# Altium PCB PCB1.PcbDoc (part 1 of 4)
Units mil, origin at the board's own origin, x right, y up, seen from the top; angles counter-clockwise.
Board outline 4724.41 x 4724.41 mil, 4 copper layers (Top Layer, GND, VCC, Bottom Layer); 291 components, 240 nets, 990 pads, 328 vias.
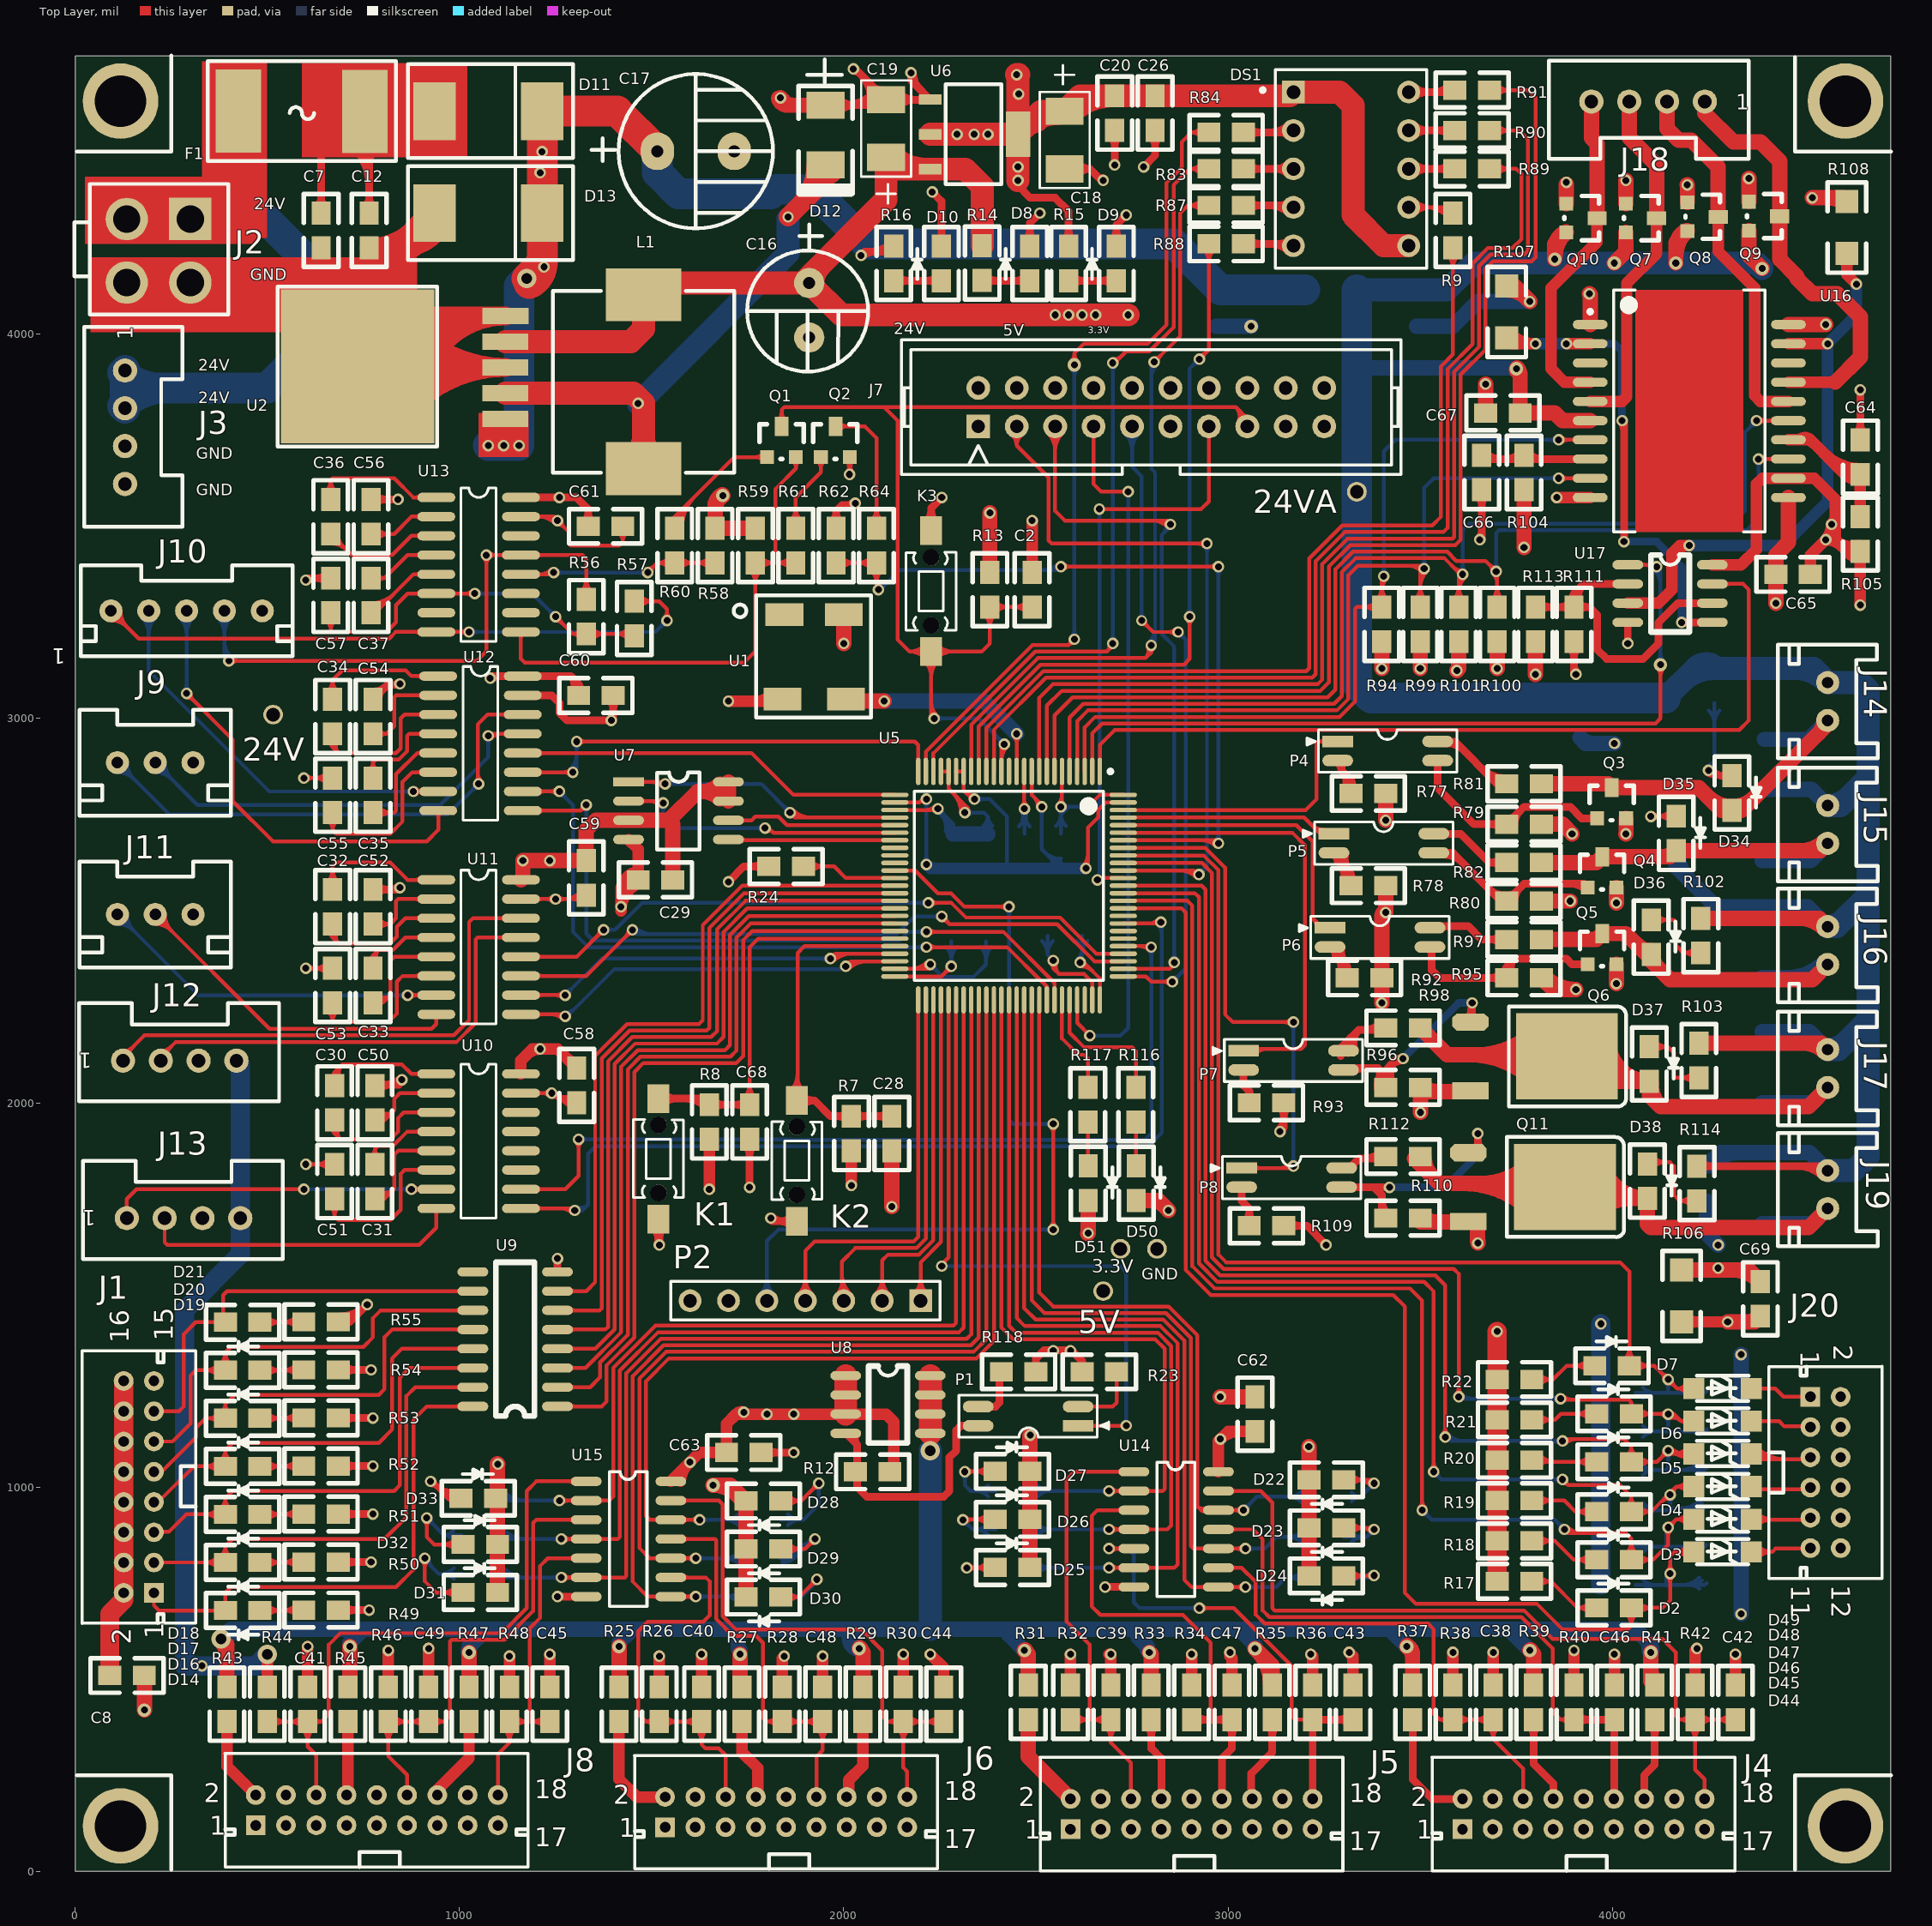
[diagram p0: Top Layer view]
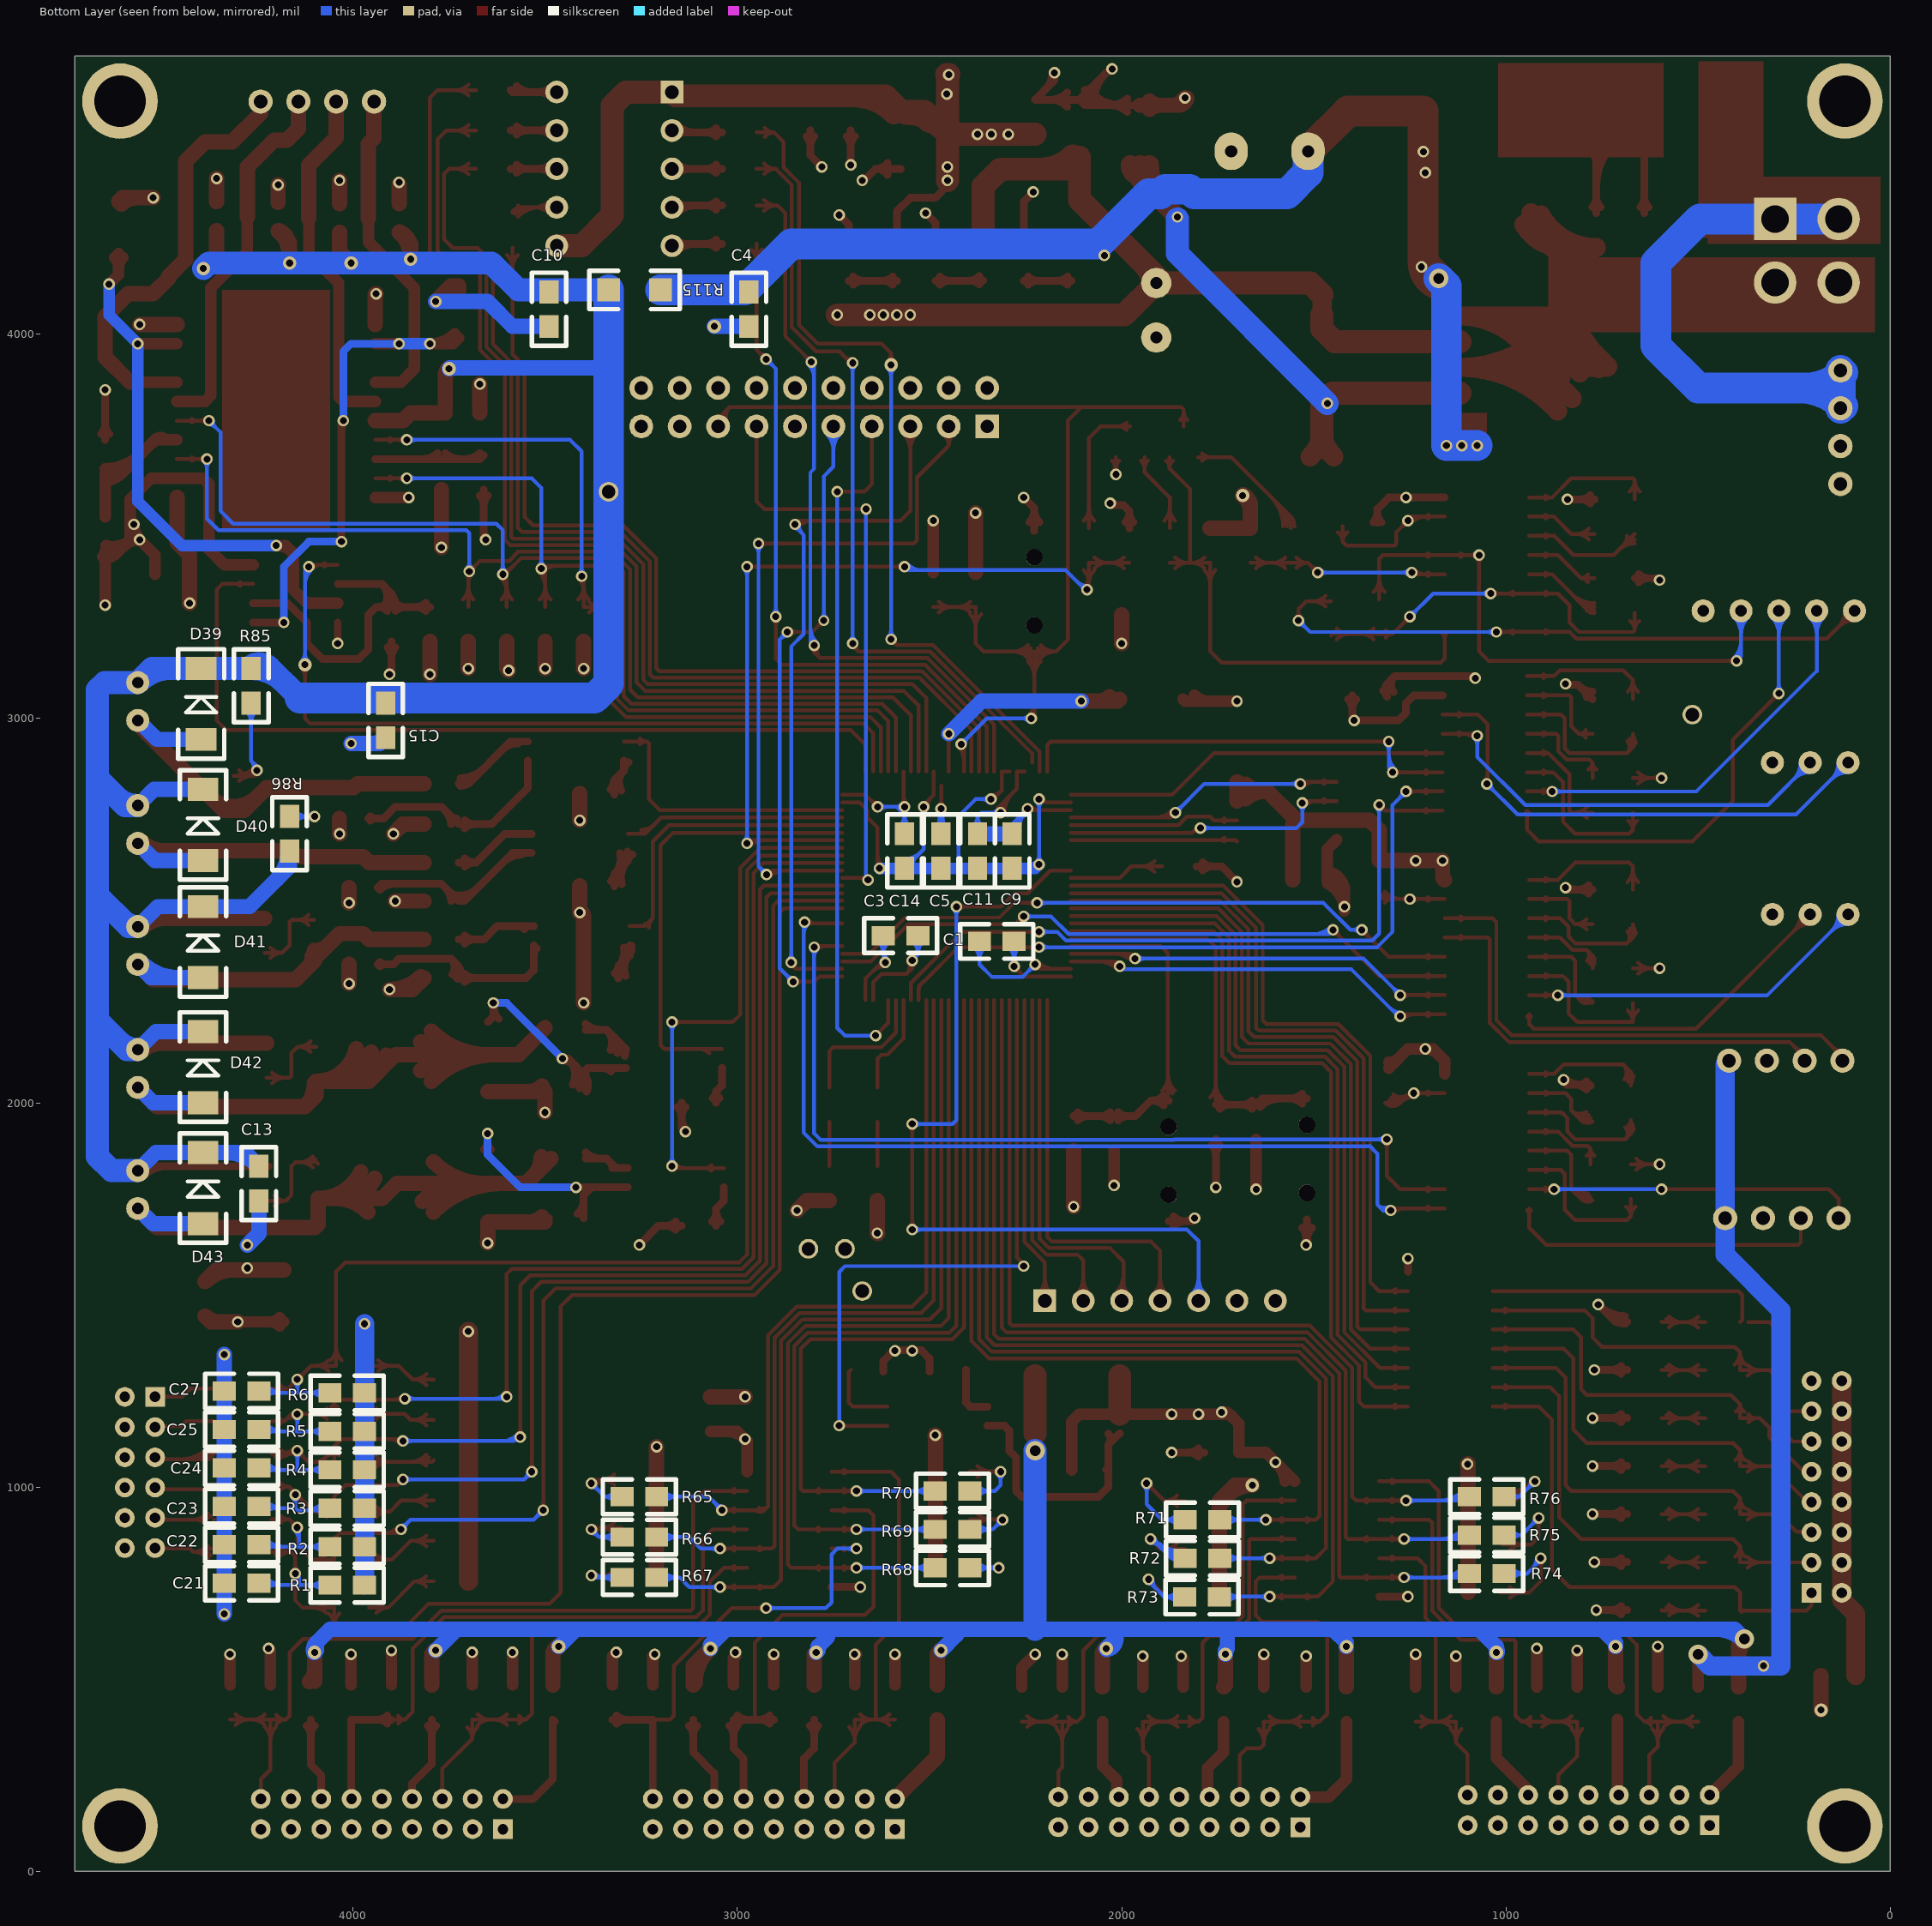
[diagram p1: Bottom Layer view, seen from below]
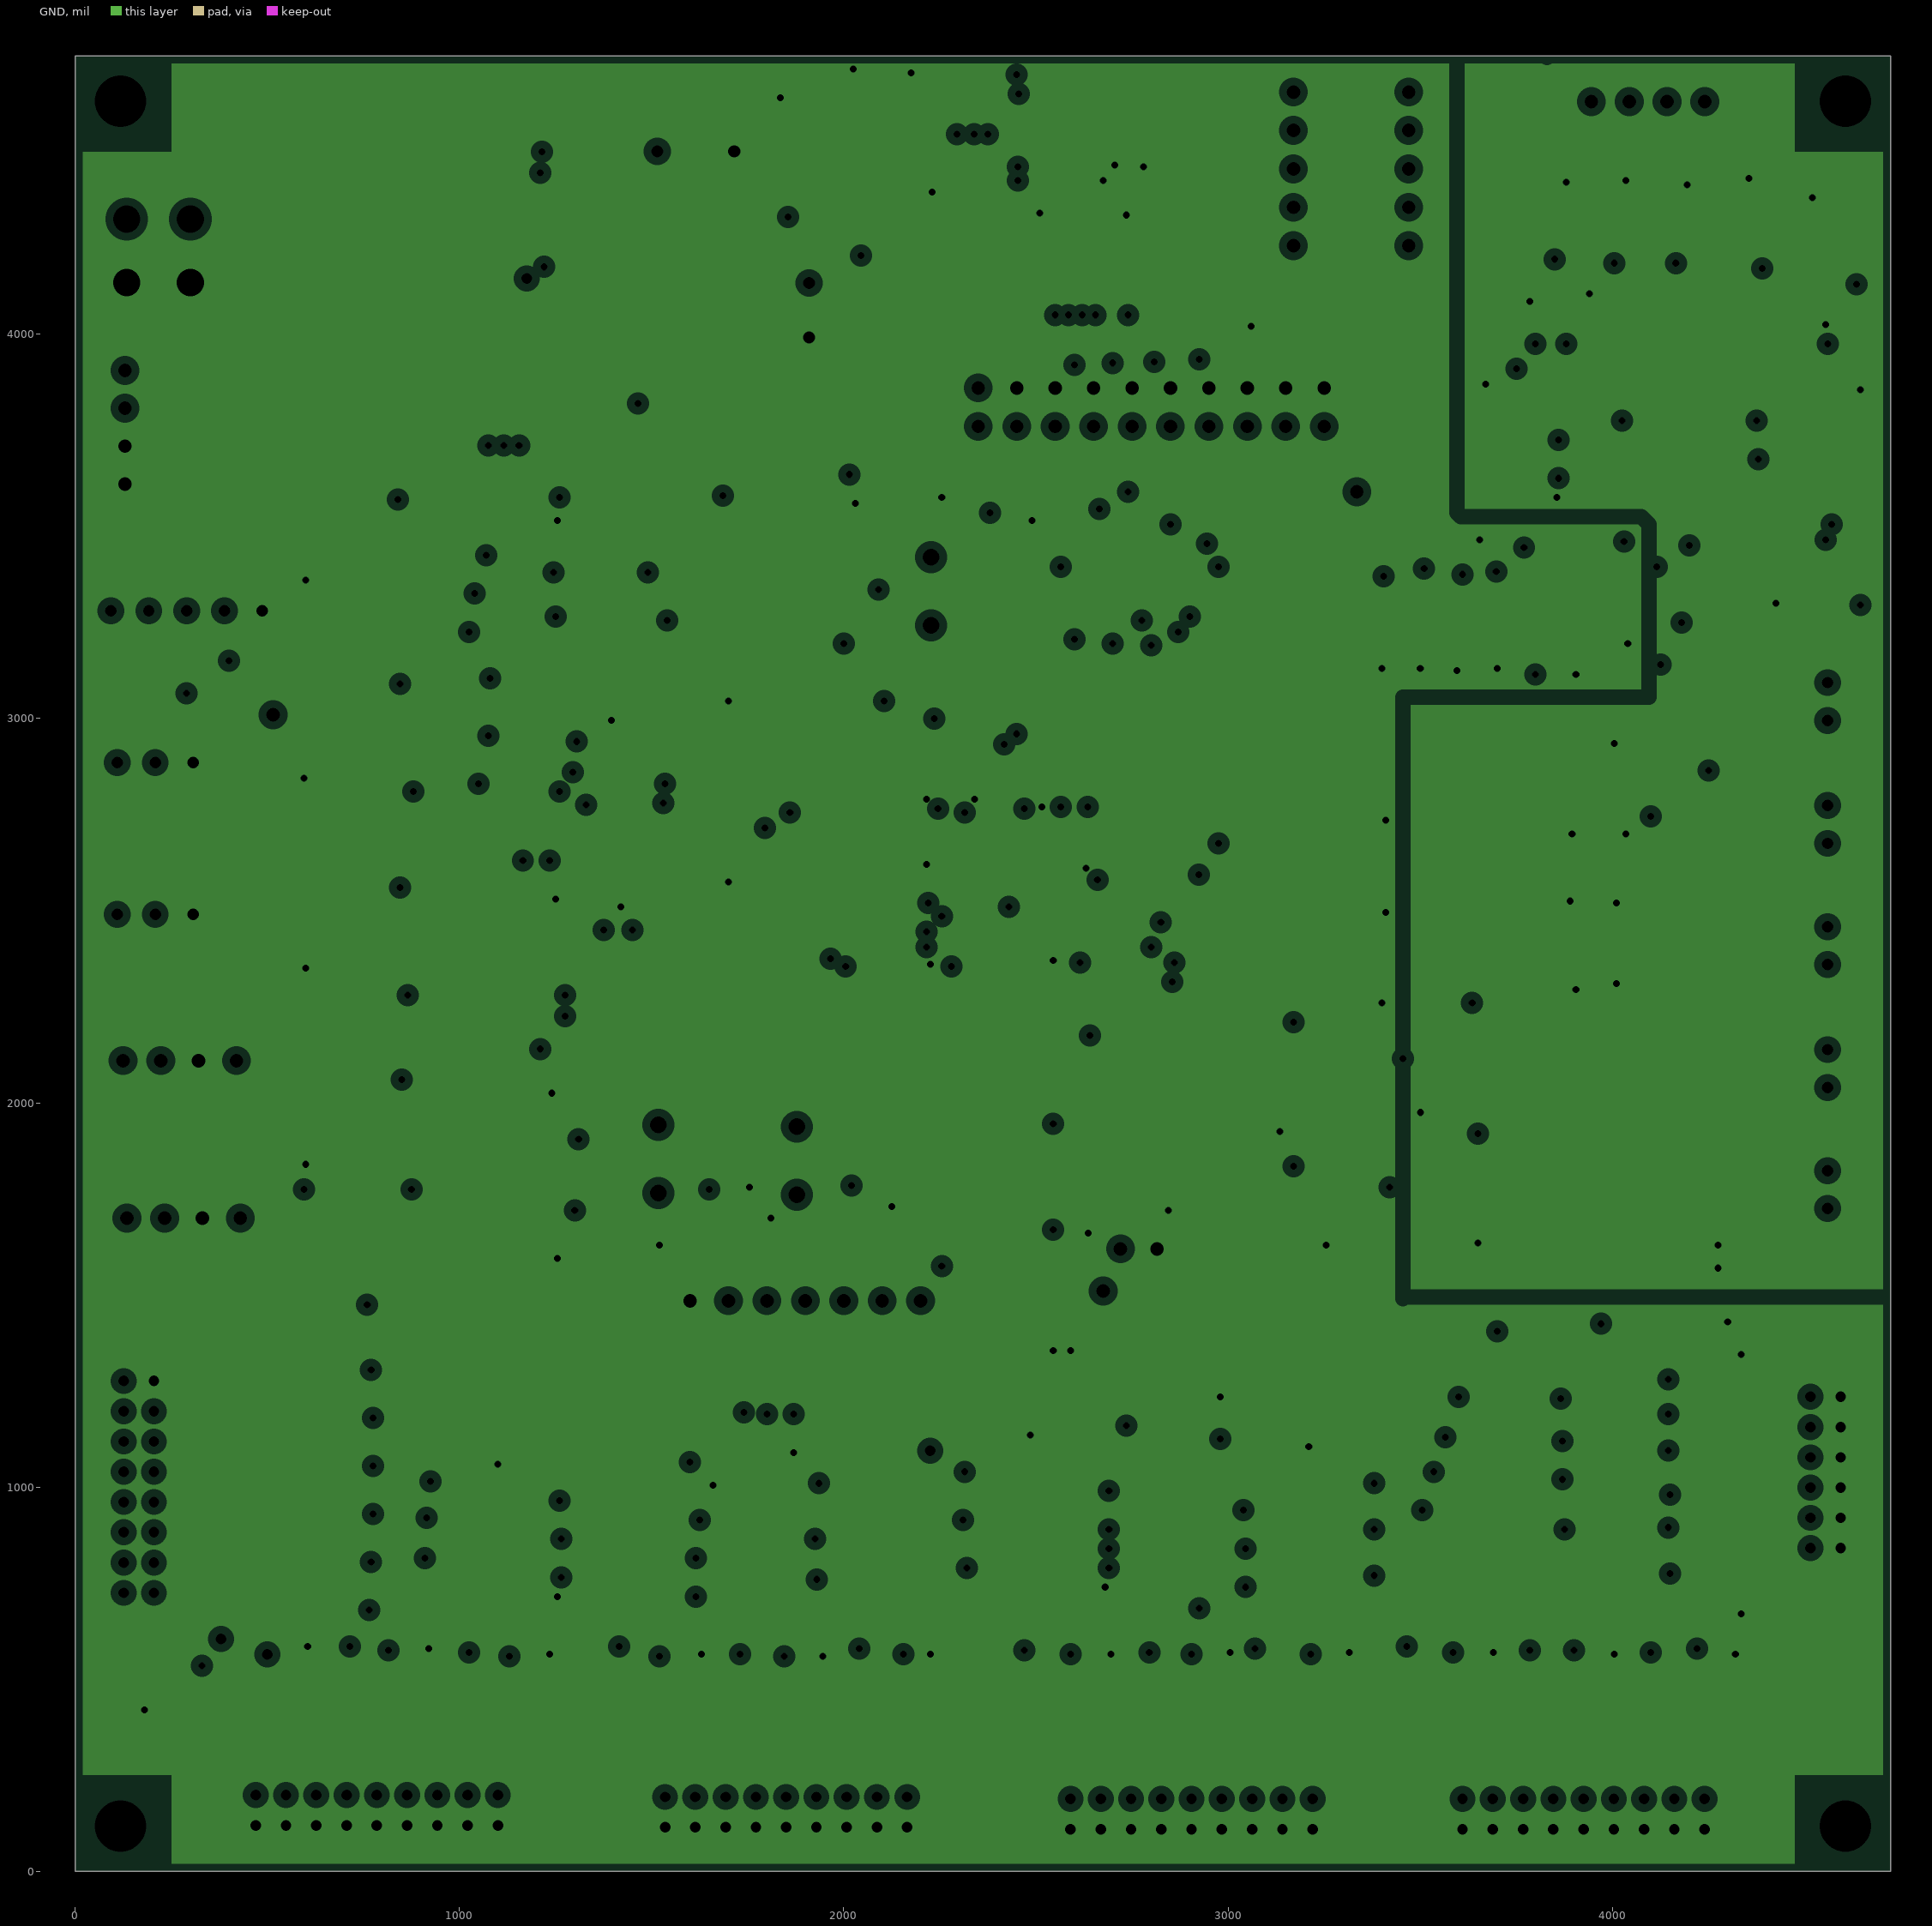
[diagram p2: GND, clearances drawn from the general rule]
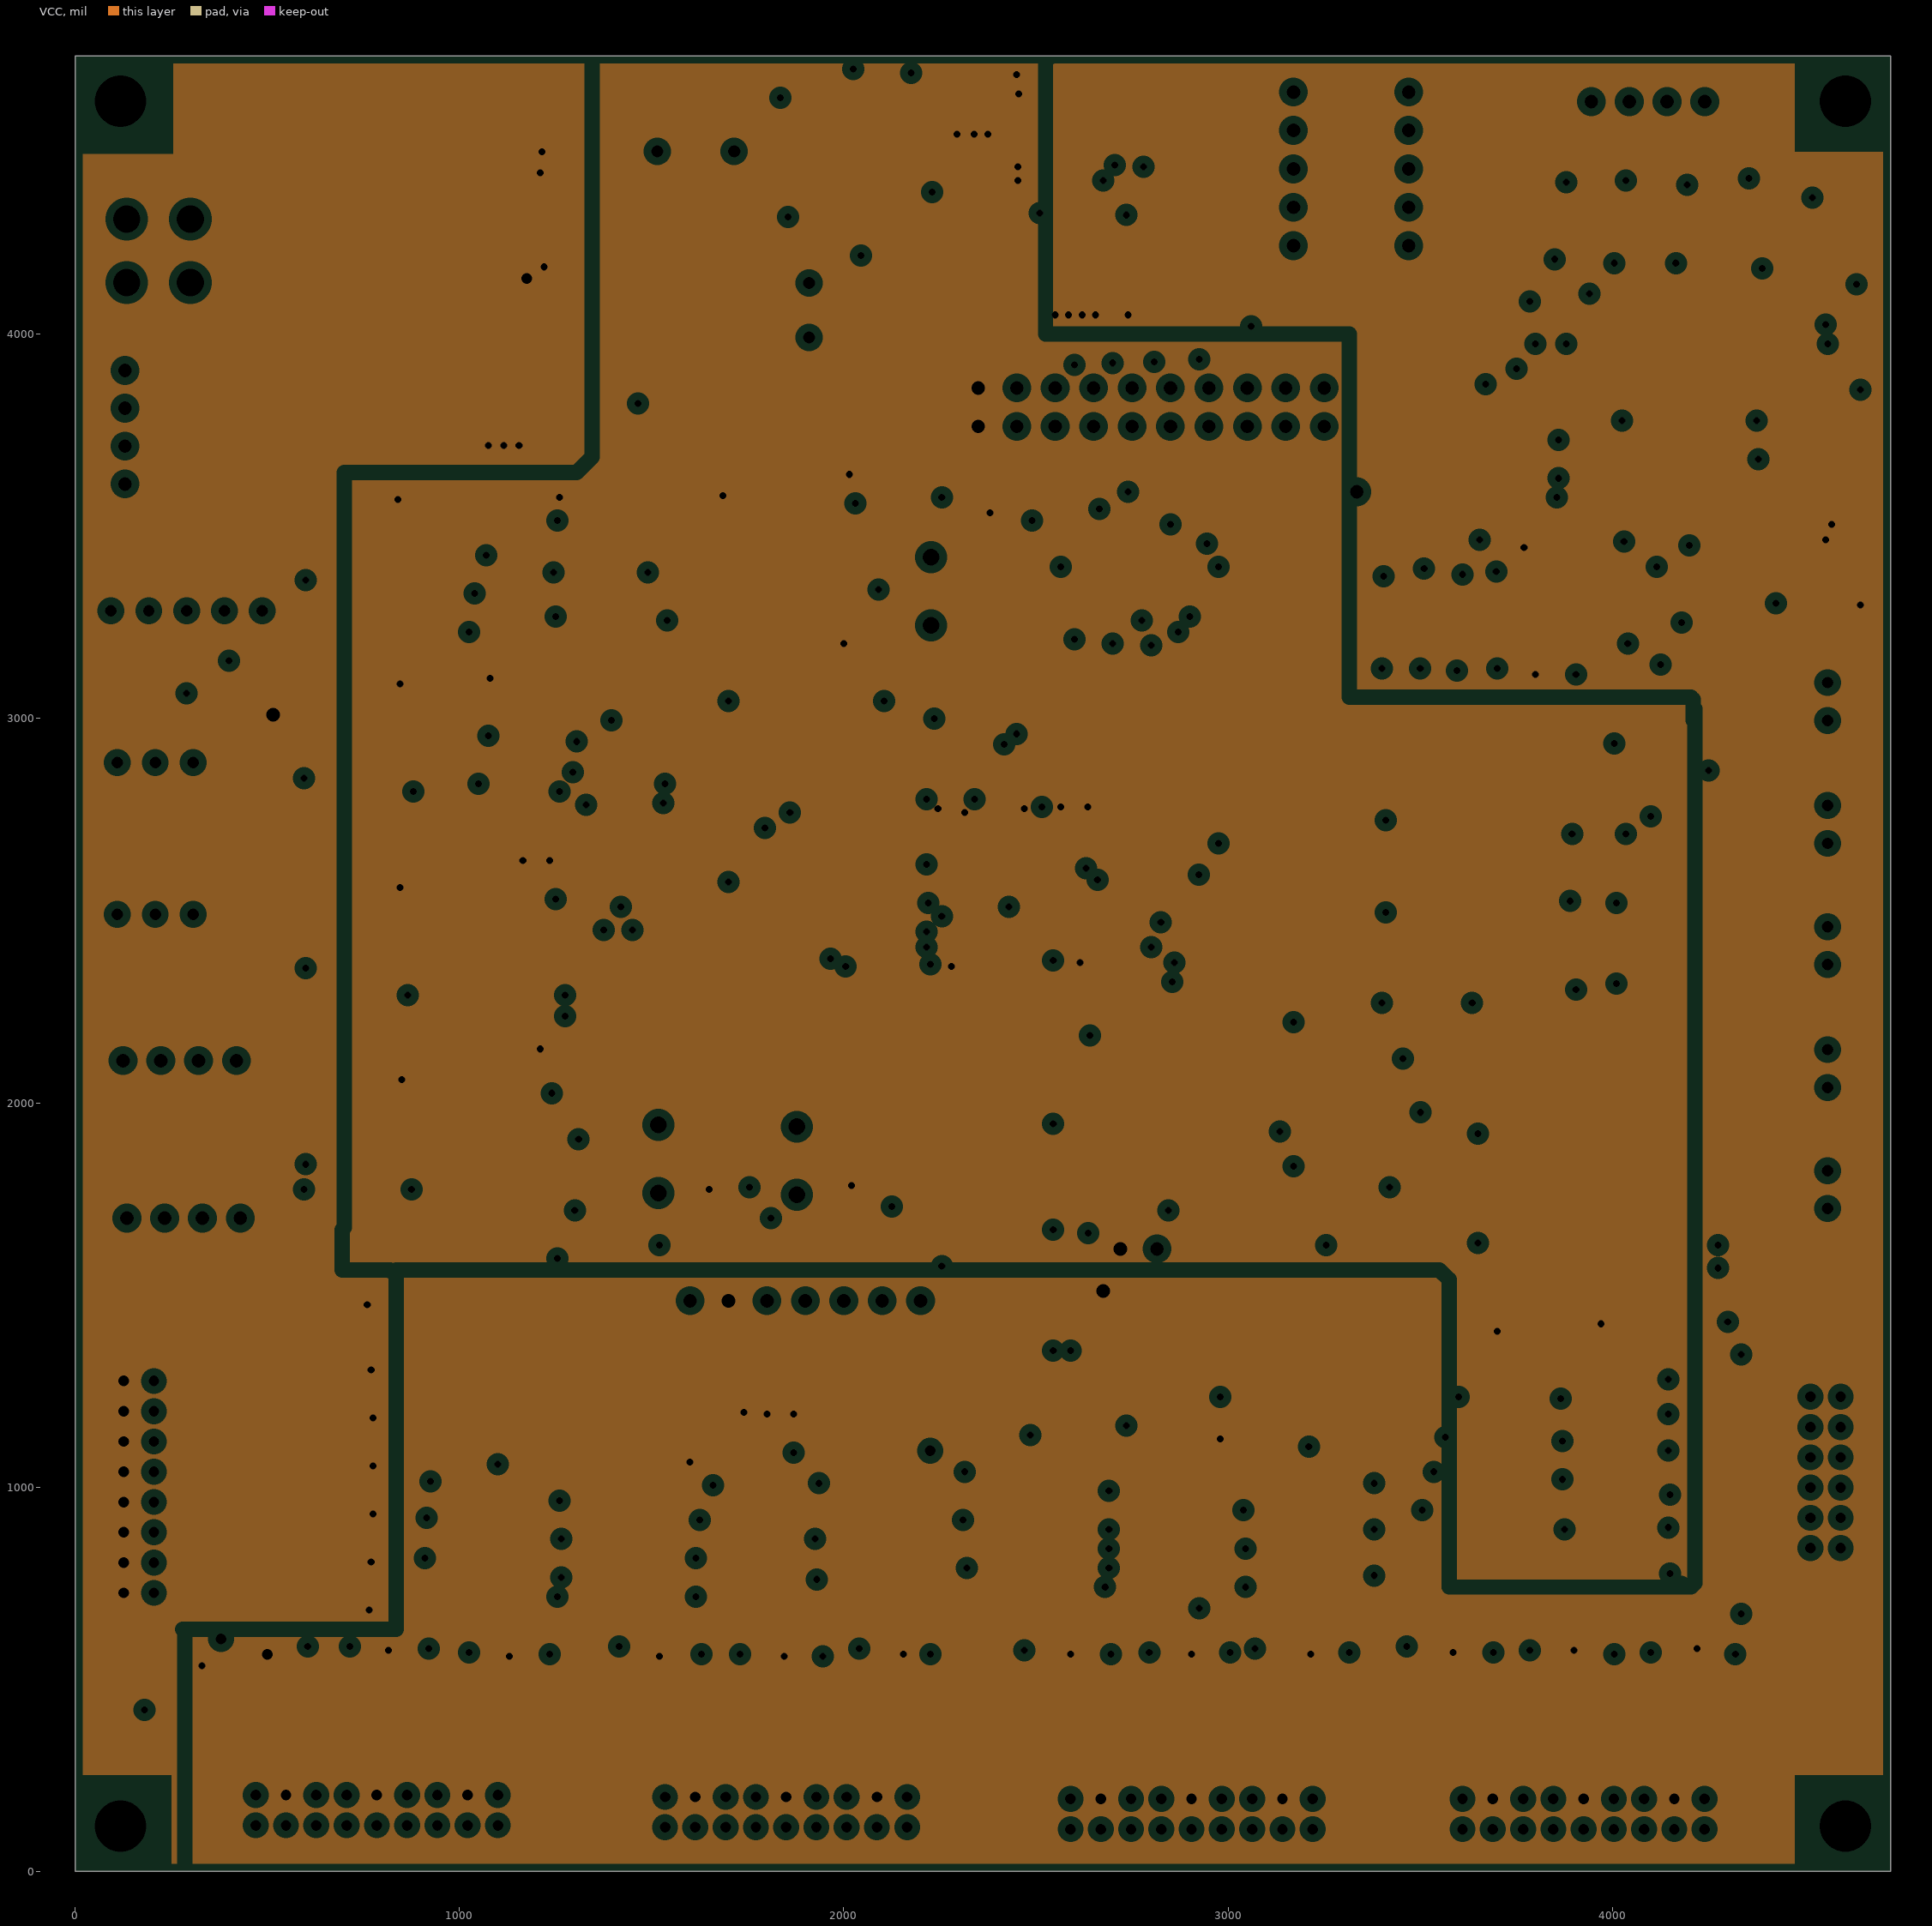
[diagram p3: VCC, clearances drawn from the general rule]

## Layer stack, top to bottom
Top Layer: signal copper 1.4
Dielectric: core 12.6, FR-4, Dk 4.8
GND: plane copper 1.4, net (Multiple Nets)
Dielectric: prepreg 12.6, FR-4, Dk 4.8
VCC: plane copper 1.4, net (Multiple Nets)
Dielectric: core 12.6, FR-4, Dk 4.8
Bottom Layer: signal copper 1.4

## Board outline
0,0 0,4724.41 4724.41,4724.41 4724.41,0

## Design rules (kind name [scope] priority, off if disabled: settings)
Clearance [All] p1: gap=7
ComponentClearance [All] p1 off: gap=10 collisioncheckmode=3 verticalgap=10 showdistances=FALSE
PlaneClearance [All] p1: clearance=20
PlaneConnect [All] p1: planeconnectstyle=Relief reliefexpansion=20 reliefentries=4 reliefconductorwidth=10 reliefairgap=10
PolygonConnect [All] p1: connectstyle=Relief reliefconductorwidth=10 reliefentries=4 polygonreliefangle="90 Angle" airgapwidth=10
RoutingVias [All] p1: holewidth=100 width=50 viastyle="Through Hole" minholewidth=10 minwidth=20 maxholewidth=28 maxwidth=200
SilkToSilkClearance [All] p1 off: silktosilkclearance=10
SolderMaskExpansion [All] p1: expansion=4
Width [All] p1: maxlimit=100 minlimit=10 preferedwidth=10
24 further rules are at their usual default settings.

## Components (designator, comment, footprint, x,y, rotation, side; value= is the part's Value field where it differs from the comment)
C1 "100nF-0805-50V-20%" 0805 2280,2420 r0 bottom
C2 "100nF-0805-50V-20%" 0805 2490,3380 r270 top
C3 "100nF-0805-50V-20%" 0805 2620,2435 r180 bottom
C4 "100nF-0805-50V-20%" 0805 2970,4110 r270 bottom
C5 "100nF-0805-50V-20%" 0805 2470,2610 r90 bottom
C7 "100nF-0805-50V-20%" 0805 640,4315 r270 top
C8 "100nF-0805-50V-20%" 0805 90,510 r0 top
C9 "100nF-0805-50V-20%" 0805 2285,2700 r270 bottom
C10 "100nF-0805-50V-20%" 0805 3490,4110 r270 bottom
C11 "100nF-0805-50V-20%" 0805 2375,2700 r270 bottom
C12 "10nF-0805-50V-20%" 0805 765,4315 r270 top
C13 "100nF-0805-50V-20%" 0805 4245,1835 r270 bottom
C14 "100nF-0805-50V-20%" 0805 2565,2700 r270 bottom
C15 "100nF-0805-50V-20%" 0805 3915,3040 r270 bottom
C16 "'16V-YXA-330UF-20%  8*11.5" "RB.2/.4 - 8MM" 1910,4070 r0 top
C17 "35YXF1000MEFC1V12.5*25" RB.2/.4 1605,4480 r90 top
C18 "10uF-1411-16V-20%" 1411-B 2575,4580 r270 top
C19 "10uF-1411-16V-20%" 1411-B 2110,4460 r90 top
C20 "100nF-0805-50V-20%" 0805 2705,4620 r270 top
C21 "100nF-0805-50V-20%" 0805 4335,750 r180 bottom
C22 "100nF-0805-50V-20%" 0805 4335,850 r180 bottom
C23 "100nF-0805-50V-20%" 0805 4335,950 r180 bottom
C24 "100nF-0805-50V-20%" 0805 4335,1050 r180 bottom
C25 "100nF-0805-50V-20%" 0805 4335,1150 r180 bottom
C26 "10nF-0805-50V-20%" 0805 2810,4620 r270 top
C27 "100nF-0805-50V-20%" 0805 4335,1250 r180 bottom
C28 "100nF-0805-50V-20%" 0805 2125,1965 r270 top
C29 "100nF-0805-50V-20%" 0805 1555,2580 r180 top
C30 "100nF-0805-50V-20%" 0805 675,1955 r90 top
C31 "100nF-0805-50V-20%" 0805 780,1840 r270 top
C32 "100nF-0805-50V-20%" 0805 670,2465 r90 top
C33 "100nF-0805-50V-20%" 0805 775,2350 r270 top
C34 "100nF-0805-50V-20%" 0805 670,2960 r90 top
C35 "100nF-0805-50V-20%" 0805 775,2845 r270 top
C36 "100nF-0805-50V-20%" 0805 665,3480 r90 top
C37 "100nF-0805-50V-20%" 0805 770,3365 r270 top
C38 "1nF-0805-50V-20%" 0805 3690,395 r90 top
C39 "1nF-0805-50V-20%" 0805 2695,395 r90 top
C40 "1nF-0805-50V-20%" 0805 1630,390 r90 top
C41 "1nF-0805-50V-20%" 0805 605,390 r90 top
C42 "1nF-0805-50V-20%" 0805 4320,395 r90 top
C43 "1nF-0805-50V-20%" 0805 3325,395 r90 top
C44 "1nF-0805-50V-20%" 0805 2260,390 r90 top
C45 "1nF-0805-50V-20%" 0805 1235,390 r90 top
C46 "1nF-0805-50V-20%" 0805 4005,395 r90 top
C47 "1nF-0805-50V-20%" 0805 3010,395 r90 top
C48 "1nF-0805-50V-20%" 0805 1945,390 r90 top
C49 "1nF-0805-50V-20%" 0805 920,390 r90 top
C50 "100nF-0805-50V-20%" 0805 780,1955 r90 top
C51 "100nF-0805-50V-20%" 0805 675,1750 r90 top
C52 "100nF-0805-50V-20%" 0805 775,2465 r90 top
C53 "100nF-0805-50V-20%" 0805 670,2260 r90 top
C54 "100nF-0805-50V-20%" 0805 775,2960 r90 top
C55 "100nF-0805-50V-20%" 0805 670,2755 r90 top
C56 "100nF-0805-50V-20%" 0805 770,3480 r90 top
C57 "100nF-0805-50V-20%" 0805 665,3275 r90 top
C58 "100nF-0805-50V-20%" 0805 1305,2090 r270 top
C59 "100nF-0805-50V-20%" 0805 1330,2630 r270 top
C60 "100nF-0805-50V-20%" 0805 1310,3060 r0 top
C61 "100nF-0805-50V-20%" 0805 1335,3500 r0 top
C62 "100nF-0805-50V-20%" 0805 3070,1145 r90 top
C63 "100nF-0805-50V-20%" 0805 1695,1090 r0 top
C64 "100nF-0805-50V-20%" 0805 4645,3635 r90 top
C65 "100nF-0805-50V-20%" 0805 4515,3375 r180 top
C66 "100nF-0805-50V-20%" 0805 3660,3595 r90 top
C67 "100nF-0805-50V-20%" 0805 3760,3795 r180 top
C68 "100nF-0805-50V-20%" 0805 1755,1995 r270 top
C69 "100nF-0805-50V-20%" 0805 4385,1445 r90 top
D2 "LED-0805-GREEN" LED-0805 3960,690 r0 top
D3 "LED-0805-GREEN" LED-0805 3960,815 r0 top
D4 "LED-0805-GREEN" LED-0805 3960,940 r0 top
D5 "LED-0805-GREEN" LED-0805 3960,1070 r0 top
D6 "LED-0805-GREEN" LED-0805 3960,1195 r0 top
D7 "LED-0805-GREEN" LED-0805 3955,1320 r0 top
D8 "LED-0805-GREEN" LED-0805 2480,4140 r90 top
D9 "LED-0805-GREEN" LED-0805 2705,4140 r90 top
D10 "LED-0805-GREEN" LED-0805 2250,4140 r90 top
D11 "B540C" SMC 935,4580 r0 top
D12 "1N5822" "IN5822 SMT" 1945,4520 r180 top
D13 "SMCJ30A-TR" SMC 935,4315 r0 top
D14 "LED-0805-GREEN" LED-0805 480,675 r180 top
D16 "LED-0805-GREEN" LED-0805 480,800 r180 top
D17 "LED-0805-GREEN" LED-0805 480,925 r180 top
D18 "LED-0805-GREEN" LED-0805 480,1050 r180 top
D19 "LED-0805-GREEN" LED-0805 480,1175 r180 top
D20 "LED-0805-GREEN" LED-0805 480,1300 r180 top
D21 "LED-0805-GREEN" LED-0805 480,1425 r180 top
D22 "LED-0805-GREEN" LED-0805 3300,1015 r180 top
D23 "LED-0805-GREEN" LED-0805 3300,890 r180 top
D24 "LED-0805-GREEN" LED-0805 3300,765 r180 top
D25 "LED-0805-GREEN" LED-0805 2395,795 r0 top
D26 "LED-0805-GREEN" LED-0805 2395,920 r0 top
D27 "LED-0805-GREEN" LED-0805 2395,1045 r0 top
D28 "LED-0805-GREEN" LED-0805 1835,960 r180 top
D29 "LED-0805-GREEN" LED-0805 1835,835 r180 top
D30 "LED-0805-GREEN" LED-0805 1835,710 r180 top
D31 "LED-0805-GREEN" LED-0805 1010,730 r0 top
D32 "LED-0805-GREEN" LED-0805 1010,855 r0 top
D33 "LED-0805-GREEN" LED-0805 1005,975 r0 top
D34 "LED-0805-GREEN" LED-0805 4315,2850 r270 top
D35 "LED-0805-GREEN" LED-0805 4170,2745 r270 top
D36 "LED-0805-GREEN" LED-0805 4105,2475 r270 top
D37 "LED-0805-GREEN" LED-0805 4100,2145 r270 top
D38 "LED-0805-GREEN" LED-0805 4095,1840 r270 top
D39 "FR107" DO-214AC 4395,2945 r90 bottom
D40 "FR107" DO-214AC 4390,2630 r90 bottom
D41 "FR107" DO-214AC 4390,2325 r90 bottom
D42 "FR107" DO-214AC 4390,2000 r90 bottom
D43 "FR107" DO-214AC 4390,1685 r90 bottom
D44 "LL60P" DIODE 4320,740 r270 top
D45 "LL60P" DIODE 4320,825 r270 top
D46 "LL60P" DIODE 4320,910 r270 top
D47 "LL60P" DIODE 4320,995 r270 top
D48 "LL60P" DIODE 4320,1080 r270 top
D49 "LL60P" DIODE 4320,1165 r270 top
D50 "LED-0805-GREEN" LED-0805 2765,1835 r270 top
D51 "LED-0805-GREEN" LED-0805 2640,1835 r270 top
DS1 "SM430391N" LEDDIP-10 3470,4630 r0 top
F1 "FSMD185-2920" 2920 590,4575 r180 top
J1 "A2008WVA-2X8P" A2008WVA-2X8P 205,725 r90 top
J2 "C4201WV-2*2P" "MX4 .2- 2*2P-180" 215,4210 r0 top
J3 "A2508WV-4P" W143-4 130,3610 r180 top
J4 "A2008WVA-2X9P" A2008WVA-2X9P 3610,110 r0 top
J5 "A2008WVA-2X9P" A2008WVA-2X9P 2590,110 r0 top
J6 "A2008WVA-2X9P" A2008WVA-2X9P 1535,115 r0 top
J7 "A2547WV-N-2X10P" JTAG_20 2800,3810 r0 top
J8 "A2008WVA-2X9P" A2008WVA-2X9P 470,120 r0 top
J9 "A2508WV-3P" H3 110,2885 r180 top
J10 "A2508WV-5P" H5 290,3280 r180 top
J11 "A2508WV-3P" H3 110,2490 r180 top
J12 "A2508WV-4P" W143-4 420,2110 r270 top
J13 "A2508WV-5P" W143-4 430,1700 r270 top
J14 "A2508WV-2P" "2.5-2P  180 JXT" 4560,2995 r90 top
J15 "A2508WV-2P" "2.5-2P  180 JXT" 4560,2675 r90 top
J16 "A2508WV-2P" "2.5-2P  180 JXT" 4560,2360 r90 top
J17 "A2508WV-2P" "2.5-2P  180 JXT" 4560,2040 r90 top
J18 "A2508WV-4P" W143-4 3945,4605 r90 top
J19 "A2508WV-2P" "2.5-2P  180 JXT" 4560,1725 r90 top
J20 "A2008WVA-2X6P" A2008WVA-2X6P 4515,1235 r270 top
K1 "贴片2脚-3.5mm*6mm*5mm带定位" BUTTON2 1520,1850 r0 top (schematic designator k1)
K2 "贴片2脚-3.5mm*6mm*5mm带定位" BUTTON2 1880,1845 r0 top (schematic designator k2)
K3 "贴片2脚-3.5mm*6mm*5mm带定位" BUTTON2 2225,3335 r180 top
L1 "Inductor" "INDUCTOR SMT7" 1715,3640 r90 top
P1 "EL3H7-G" SSOP4 2480,1185 r180 top
P2 "A2541WV-7P" HDR1X7 2200,1485 r180 top
P4 "EL3H7-G" SSOP4 3415,2915 r0 top
P5 "EL3H7-G" SSOP4 3405,2675 r0 top
P6 "EL3H7-G" SSOP4 3395,2430 r0 top
P7 "EL3H7-G" SSOP4 3170,2110 r0 top
P8 "EL3H7-G" SSOP4 3165,1805 r0 top
Q1 "S8050" SOT-23 1800,3680 r0 top
Q2 "S8550" SOT-23 1940,3680 r0 top
Q3 "DTS4500" SOT-23 3960,2740 r0 top
Q4 "DTS4500" SOT-23 3935,2560 r0 top
Q5 "DTS4500" SOT-23 3935,2360 r0 top
Q6 "N沟道/IRFR024N" TO-252AA 3630,2210 r270 top
Q7 "BAV99" SOT-23 4035,4340 r270 top
Q8 "BAV99" SOT-23 4194.86,4343.48 r270 top
Q9 "BAV99" SOT-23 4355,4345 r270 top
Q10 "BAV99" SOT-23 3880,4340 r270 top
Q11 "N沟道/IRFR024N" TO-252AA 3625,1870 r270 top
R1 "10K-0805-5%" 0805 3970,745 r0 bottom
R2 "10K-0805-5%" 0805 3970,845 r0 bottom
R3 "10K-0805-5%" 0805 3970,945 r0 bottom
R4 "10K-0805-5%" 0805 3970,1045 r0 bottom
R5 "10K-0805-5%" 0805 3970,1145 r0 bottom
R6 "10K-0805-5%" 0805 3970,1245 r0 bottom
R7 "10K-0805-5%" 0805 2020,1875 r90 top
R8 "10K-0805-5%" 0805 1650,1905 r90 top
R9 "270-0805-5%" 0805 3585,4225 r90 top
R12 "5.1K-0805-5%" 0805 2120,1040 r180 top
R13 "10K-0805-5%" 0805 2380,3290 r90 top
R14 "1.5K-0805-5%" 0805 2360,4230 r270 top
R15 "1K-0805-5%" 0805 2585,4229.07 r270 top
R16 "10K-0805-5%" 0805 2130,4229.07 r270 top
R17 "1K-0805-5%" 0805 3700,755 r0 top
R18 "1K-0805-5%" 0805 3700,860 r0 top
R19 "1K-0805-5%" 0805 3700,965 r0 top
R20 "1K-0805-5%" 0805 3700,1070 r0 top
R21 "1K-0805-5%" 0805 3700,1175 r0 top
R22 "1K-0805-5%" 0805 3700,1280 r0 top
R23 "510-0805-5%" 0805 2710,1300 r180 top
R24 "100K-0805-5%" 0805 1805,2615 r0 top
R25 "1K-0805-5%" 0805 1415,480 r270 top
R26 "5.1K-0805-5%" 0805 1520,480 r270 top
R27 "100-0805-5%" 0805 1735,480 r270 top
R28 "5.1K-0805-5%" 0805 1840,480 r270 top
R29 "100-0805-5%" 0805 2050,480 r270 top
R30 "5.1K-0805-5%" 0805 2155,480 r270 top
R31 "1K-0805-5%" 0805 2480,485 r270 top
R32 "5.1K-0805-5%" 0805 2590,485 r270 top
R33 "1K-0805-5%" 0805 2800,485 r270 top
R34 "5.1K-0805-5%" 0805 2905,485 r270 top
R35 "1K-0805-5%" 0805 3115,485 r270 top
R36 "5.1K-0805-5%" 0805 3220,485 r270 top
R37 "1K-0805-5%" 0805 3480,485 r270 top
R38 "5.1K-0805-5%" 0805 3585,485 r270 top
R39 "100-0805-5%" 0805 3795,485 r270 top
R40 "5.1K-0805-5%" 0805 3900,485 r270 top
R41 "100-0805-5%" 0805 4110,485 r270 top
R42 "5.1K-0805-5%" 0805 4215,485 r270 top
R43 "1K-0805-5%" 0805 395,480 r270 top
R44 "5.1K-0805-5%" 0805 500,480 r270 top
R45 "1K-0805-5%" 0805 710,480 r270 top
R46 "5.1K-0805-5%" 0805 815,480 r270 top
R47 "1K-0805-5%" 0805 1025,480 r270 top
R48 "5.1K-0805-5%" 0805 1130,480 r270 top
R49 "5.1K-0805-5%" 0805 595,680 r0 top
R50 "5.1K-0805-5%" 0805 595,805 r0 top
R51 "5.1K-0805-5%" 0805 595,930 r0 top
R52 "5.1K-0805-5%" 0805 595,1055 r0 top
R53 "5.1K-0805-5%" 0805 595,1180 r0 top
R54 "5.1K-0805-5%" 0805 595,1305 r0 top
R55 "5.1K-0805-5%" 0805 595,1430 r0 top
R56 "10K-0805-5%" 0805 1330,3220 r90 top
R57 "10K-0805-5%" 0805 1455,3215 r90 top
R58 "10K-0805-5%" 0805 1665,3405 r90 top
R59 "10K-0805-5%" 0805 1770,3495 r270 top
R60 "1K-0805-5%" 0805 1560,3495 r270 top
R61 "1K-0805-5%" 0805 1875,3495 r270 top
R62 "100K-0805-5%" 0805 1980,3405 r90 top
R64 "1K-0805-5%" 0805 2085,3405 r90 top
R65 "5.1K-0805-5%" 0805 3210,975 r0 bottom
R66 "5.1K-0805-5%" 0805 3210,870 r0 bottom
R67 "5.1K-0805-5%" 0805 3210,765 r0 bottom
R68 "5.1K-0805-5%" 0805 2485,790 r180 bottom
R69 "5.1K-0805-5%" 0805 2485,890 r180 bottom
R70 "5.1K-0805-5%" 0805 2485,990 r180 bottom
R71 "5.1K-0805-5%" 0805 1745,915 r0 bottom
R72 "5.1K-0805-5%" 0805 1745,815 r0 bottom
R73 "5.1K-0805-5%" 0805 1745.93,714.09 r0 bottom
R74 "5.1K-0805-5%" 0805 1095,775 r180 bottom
R75 "5.1K-0805-5%" 0805 1095,875 r180 bottom
R76 "5.1K-0805-5%" 0805 1095,975 r180 bottom
R77 "510-0805-5%" 0805 3320,2805 r0 top
R78 "510-0805-5%" 0805 3320,2565 r0 top
R79 "10K-0805-5%" 0805 3725,2725 r0 top
R80 "10K-0805-5%" 0805 3725,2525 r0 top
R81 "1K-0805-5%" 0805 3725,2830 r0 top
R82 "1K-0805-5%" 0805 3725,2625 r0 top
R83 "270-0805-5%" 0805 2950,4430 r0 top
R84 "270-0805-5%" 0805 2950,4525 r0 top
R85 "10K-0805-5%" 0805 4265,3130 r270 bottom
R86 "10K-0805-5%" 0805 4165,2655 r90 bottom
R87 "270-0805-5%" 0805 2950,4335 r0 top
R88 "270-0805-5%" 0805 2950,4235 r0 top
R89 "270-0805-5%" 0805 3680,4430 r180 top
R90 "270-0805-5%" 0805 3680,4530 r180 top
R91 "270-0805-5%" 0805 3680,4635 r180 top
R92 "510-0805-5%" 0805 3310,2325 r0 top
R93 "510-0805-5%" 0805 3055,2000 r0 top
R94 "10K-0805-5%" 0805 3400,3200 r90 top
R95 "10K-0805-5%" 0805 3725,2325 r0 top
R96 "10K-0805-5%" 0805 3410,2040 r0 top
R97 "1K-0805-5%" 0805 3725,2425 r0 top
R98 "10K-0805-5%" 0805 3410,2195 r0 top
R99 "10K-0805-5%" 0805 3500,3200 r90 top
R100 "10K-0805-5%" 0805 3700,3200 r90 top
R101 "10K-0805-5%" 0805 3600,3200 r90 top
R102 "10K-0805-5%" 0805 4230,2480 r270 top
R103 "10K-0805-5%" 0805 4225,2155 r270 top
R104 "10K-0805-5%" 0805 3770,3595 r90 top
R105 "10K-0805-5%" 0805 4645,3435 r90 top
R106 "0R-1206-5%" 1206 4180,1565 r270 top
R107 "1R5-1206-5%" 1206 3725,3990 r90 top
R108 "1R5-1206-5%" 1206 4610,4210 r90 top
R109 "510-0805-5%" 0805 3055,1680 r0 top
R110 "10K-0805-5%" 0805 3410,1700 r0 top
R111 "10K-0805-5%" 0805 3900,3290 r270 top
R112 "10K-0805-5%" 0805 3410,1860 r0 top
R113 "10K-0805-5%" 0805 3800,3200 r90 top
R114 "10K-0805-5%" 0805 4220,1835 r270 top
R115 "0R-1206-5%" 1206 3335,4115 r180 bottom
R116 "1K-0805-5%" 0805 2760,2040 r270 top
R117 "1K-0805-5%" 0805 2635,2040 r270 top
R118 "1K-0805-5%" 0805 2500,1300 r180 top
U1 "HXO-36B-8MHZ-7.0*5.0*1.5-SMD" OSC_4_S 1845,3270 r0 top
U2 "LM2576-5" TO-263 895,3940 r90 top
U5 "MCU" LQFP100_N 2430,2565 r270 top
U6 "LM1117MPX-3.3" SOT-223-3L 2225,4520 r0 top
U7 "W25Q64" SO-8M 1440,2835 r0 top
U8 "IRF7404PBF" SO-8 2005,1290 r0 top
U9 "ULN2003A" SO-16 1255,1210 r180 top
U10 "MAX3232ESE" SOIC-16 940,2075 r0 top
U11 "MAX3232ESE" SOIC-16 940,2580 r0 top
U12 "MAX3232ESE" SOIC-16 945,3110 r0 top
U13 "MAX3232ESE" SOIC-16 940,3575 r0 top
U14 "74HC14D" SO-14 2755,1040 r0 top
U15 "74HC14D" SO-14 1330,1015 r0 top
U16 "L298P" POWERSO20_N 4200,3800 r0 top
U17 "LM393AD" SO-8 4040,3400 r0 top

## Footprints (in the part's own frame and the unit in brackets; to place one, negate y for a bottom-side part, rotate by r counter-clockwise, add the part's x,y. Pads: shape width x height; smd on the part's side, far side on the other; paste and mask are expansions set on the pad)
"2.5-2P  180 JXT" [mil]
  round 60 hole 30: 1(98.43,0) 2(0,0)
  silkscreen extent -98,-130 197,130
0805 [mil]
  rect 60x50 smd: 1(0,0) 2(90,0)
  silkscreen extent -50,-45 140,45
1206 [mil]
  rect 60x60 smd: 1(0,0) 2(135,0)
  silkscreen extent -50,-50 185,50
1411-B [mm]
  rect 1.8x2.5 smd: 1(0,0) 2(3.81,0)
  silkscreen extent -3.05,-1.65 5.08,1.65
2920 [mm]
  rect 3x5.5 smd: 1(4.199,-0.142) 2(-4.158,-0.117)
  silkscreen extent -6.22,-3.44 6.23,3.16
A2008WVA-2X6P [mm] "Connector; Header; 8x2 Position"
  rect 1.3x1.3 hole 0.7: 1(0,0)
  round 1.3 hole 0.7: 2(0,2) 3(2,0) 4(2,2) 5(4,0) 6(4,2) 7(6,0) 8(6,2) 9(8,0) 10(8,2) 11(10,0) 12(10,2)
  silkscreen extent -2.03,-2.75 12,4.75
A2008WVA-2X8P [mm] "Connector; Header; 8x2 Position"
  rect 1.3x1.3 hole 0.7: 1(0,0)
  round 1.3 hole 0.7: 2(0,2) 3(2,0) 4(2,2) 5(4,0) 6(4,2) 7(6,0) 8(6,2) 9(8,0) 10(8,2) 11(10,0) 12(10,2) 13(12,0) 14(12,2) 15(14,0) 16(14,2)
  silkscreen extent -2.03,-2.75 16,4.75
A2008WVA-2X9P [mm] "Connector; Header; 8x2 Position"
  rect 1.3x1.3 hole 0.7: 1(0,0)
  round 1.3 hole 0.7: 2(0,2) 3(2,0) 4(2,2) 5(4,0) 6(4,2) 7(6,0) 8(6,2) 9(8,0) 10(8,2) 11(10,0) 12(10,2) 13(12,0) 14(12,2) 15(14,0) 16(14,2) 17(16,0) 18(16,2)
  silkscreen extent -2.03,-2.75 18,4.75
BUTTON2 [mm]
  round 1.1 hole 1.1: 0(-0.058,-2.145) 0(-0.058,2.355)
  rect 1.44x1.9 smd: 1(-0.058,-3.895) 2(-0.058,4.085)
  silkscreen extent -1.71,-2.46 1.59,2.69
DIODE [mm]
  rect 1.4x1.4 smd: A(-2.321,-2.754) K(-2.321,1.046)
  silkscreen extent -3.17,-2.55 -1.5,0.89
DO-214AC [mil]
  rect 60x80 smd: A(0.48,0.14) K(185.48,0.14)
  silkscreen extent -50,-60 235,60
H3 [mil] "Connector; Header; 8x2 Position"
  round 60 hole 30: 1(0,0) 2(-98.43,0) 3(-196.85,0)
  silkscreen extent -295,-138 98,138
H5 [mil] "JST"
  round 60 hole 30: 1(196.85,0) 2(98.43,0) 3(0,0) 4(-98.43,0) 5(-196.85,0)
  silkscreen extent -276,-118 276,118
HDR1X7 [mm] "Connector; Header; 7 Position"
  rect 1.5x1.5 hole 0.9: 1(0,0)
  round 1.5 hole 0.9: 2(2.54,0) 3(5.08,0) 4(7.62,0) 5(10.16,0) 6(12.7,0) 7(15.24,0)
  silkscreen extent -1.27,-1.27 16.51,1.27
"IN5822 SMT" [mil]
  rect 100x70 smd: 1(-7.7,-75.6) 2(-7.7,79.4)
  silkscreen extent -78,-195 62,154
"INDUCTOR SMT7" [mm]
  rect 3.5x5 smd: 1(0.25,6) 2(11.75,6)
  silkscreen extent 0,0 12,12
JTAG_20 [mil]
  rect 62x62 hole 35: 1(-450,-50)
  round 62 hole 35: 2(-450,50) 3(-350,-50) 4(-350,50) 5(-250,-50) 6(-250,50) 7(-150,-50) 8(-150,50) 9(-50,-50) 10(-50,50) 11(50,-50) 12(50,50) 13(150,-50) 14(150,50) 15(250,-50) 16(250,50) 17(350,-50) 18(350,50) 19(450,-50) 20(450,50)
  silkscreen extent -650,-175 650,175
LED-0805 [mil]
  rect 60x50 smd: 1(-0.93,-4.09) 2(89.07,-4.09)
  silkscreen extent -51,-49 139,71
LEDDIP-10 [mm] "LED, 7-Segment Display, 7.62 mm, RHD; 10 Leads; Row Space 5.08 mm; Pitch 2.54 mm"
  rect 1.5x1.5 hole 0.9: 1(-7.62,0)
  round 1.5 hole 0.9: 2(-7.62,-2.54) 3(-7.62,-5.08) 4(-7.62,-7.62) 5(-7.62,-10.16) 6(0,-10.16) 7(0,-7.62) 8(0,-5.08) 9(0,-2.54) 10(0,0)
  silkscreen extent -9.77,-11.63 1.19,1.47
LQFP100_N [mm] "Thin QFP, 100-Leads, Body 14x14mm, Pitch 0.5mm, IPC Medium Density"
  oval 1.8x0.3 smd: 1(-7.55,6) 2(-7.55,5.5) 3(-7.55,5) 4(-7.55,4.5) 5(-7.55,4) 6(-7.55,3.5) 7(-7.55,3) 8(-7.55,2.5) 9(-7.55,2) 10(-7.55,1.5) 11(-7.55,1) 12(-7.55,0.5) 13(-7.55,0) 14(-7.55,-0.5) 15(-7.55,-1) 16(-7.55,-1.5) 17(-7.55,-2) 18(-7.55,-2.5) 19(-7.55,-3) 20(-7.55,-3.5) 21(-7.55,-4) 22(-7.55,-4.5) 23(-7.55,-5) 24(-7.55,-5.5) 25(-7.55,-6) 51(7.55,-6) 52(7.55,-5.5) 53(7.55,-5) 54(7.55,-4.5) 55(7.55,-4) 56(7.55,-3.5) 57(7.55,-3) 58(7.55,-2.5) 59(7.55,-2) 60(7.55,-1.5) 61(7.55,-1) 62(7.55,-0.5) 63(7.55,0) 64(7.55,0.5) 65(7.55,1) 66(7.55,1.5) 67(7.55,2) 68(7.55,2.5) 69(7.55,3) 70(7.55,3.5) 71(7.55,4) 72(7.55,4.5) 73(7.55,5) 74(7.55,5.5) 75(7.55,6)
  oval 0.3x1.8 smd: 26(-6,-7.55) 27(-5.5,-7.55) 28(-5,-7.55) 29(-4.5,-7.55) 30(-4,-7.55) 31(-3.5,-7.55) 32(-3,-7.55) 33(-2.5,-7.55) 34(-2,-7.55) 35(-1.5,-7.55) 36(-1,-7.55) 37(-0.5,-7.55) 38(0,-7.55) 39(0.5,-7.55) 40(1,-7.55) 41(1.5,-7.55) 42(2,-7.55) 43(2.5,-7.55) 44(3,-7.55) 45(3.5,-7.55) 46(4,-7.55) 47(4.5,-7.55) 48(5,-7.55) 49(5.5,-7.55) 50(6,-7.55) 76(6,7.55) 77(5.5,7.55) 78(5,7.55) 79(4.5,7.55) 80(4,7.55) 81(3.5,7.55) 82(3,7.55) 83(2.5,7.55) 84(2,7.55) 85(1.5,7.55) 86(1,7.55) 87(0.5,7.55) 88(0,7.55) 89(-0.5,7.55) 90(-1,7.55) 91(-1.5,7.55) 92(-2,7.55) 93(-2.5,7.55) 94(-3,7.55) 95(-3.5,7.55) 96(-4,7.55) 97(-4.5,7.55) 98(-5,7.55) 99(-5.5,7.55) 100(-6,7.55)
  silkscreen extent -7.67,-6.25 6.25,6.83, body extent -7,-7 7,7, height 1.6
"MX4 .2- 2*2P-180" [mm]
  rect 2.8x2.8 hole 1.8: 1(2.15,2.275)
  round 2.8 hole 1.8: 2(2.15,-1.925) 3(-2.05,2.275) 4(-2.05,-1.925)
  silkscreen extent -5.51,-4.04 4.65,4.59
OSC_4_S [mm]
  rect 2.5x1.5 smd: 1(0.012,0.002) 2(-0.115,-5.586) 3(4.076,-5.586) 4(3.949,0.002)
  silkscreen extent -3.34,-6.81 5.74,1.27
POWERSO20_N [mm] "SOP, 20-Leads, Body 15.9x11mm, Pitch 1.27mm, IPC Medium Density"
  oval 2.3x0.6 smd: 1(-6.55,5.715) 2(-6.55,4.445) 3(-6.55,3.175) 4(-6.55,1.905) 5(-6.55,0.635) 6(-6.55,-0.635) 7(-6.55,-1.905) 8(-6.55,-3.175) 9(-6.55,-4.445) 10(-6.55,-5.715) 11(6.55,-5.715) 12(6.55,-4.445) 13(6.55,-3.175) 14(6.55,-1.905) 15(6.55,-0.635) 16(6.55,0.635) 17(6.55,1.905) 18(6.55,3.175) 19(6.55,4.445) 20(6.55,5.715)
  Top Layer region: -3.575,-8 3.575,-8 3.575,8 -3.575,8
  silkscreen extent -6.67,-8 5,8, body extent -5.55,-8 5.55,8, height 3.6
RB.2/.4 [mm]
  oval 2.5x2.2 hole 0.8: 1(-0.102,2.288) 2(-0.102,-2.792)
  silkscreen extent -5.2,-5.35 4.99,6.64
"RB.2/.4 - 8MM" [mm]
  round 2 hole 0.8: 1(0,1.6) 2(0,-2)
  silkscreen extent -4.1,-4.25 3.9,5.46
SMC [mil]
  rect 110x150 smd: 1(0.48,0.14) 2(280.48,0.14)
  silkscreen extent -70,-122 360,122
SO-8 [mil]
  oval 80x24 smd: 1(0,0) 2(0,-50) 3(0,-100) 4(0,-150) 5(220,-150) 6(220,-100) 7(220,-50) 8(220,0)
  silkscreen extent 60,-175 160,25
SO-8M [mil]
  rect 80x24 smd: 1(0,0)
  oval 80x24 smd: 2(0,-50) 3(0,-100) 4(0,-150) 5(259.84,-150) 6(259.84,-100) 7(259.84,-50) 8(259.84,0)
  silkscreen extent 74,-176 185,25
SO-14 [mil]
  oval 80x24 smd: 1(0,0) 2(0,-50) 3(0,-100) 4(0,-150) 5(0,-200) 6(0,-250) 7(0,-300) 8(220,-300) 9(220,-250) 10(220,-200) 11(220,-150) 12(220,-100) 13(220,-50) 14(220,0)
  silkscreen extent 60,-325 158,25
SO-16 [mil]
  oval 80x24 smd: 1(0,0) 2(0,-50) 3(0,-100) 4(0,-150) 5(0,-200) 6(0,-250) 7(0,-300) 8(0,-350) 9(220,-350) 10(220,-300) 11(220,-250) 12(220,-200) 13(220,-150) 14(220,-100) 15(220,-50) 16(220,0)
  silkscreen extent 60,-375 160,25
SOIC-16 [mil]
  oval 98.43x24 smd: 1(-0.17,0.14) 2(-0.17,-49.86) 3(-0.17,-99.86) 4(-0.17,-149.86) 5(-0.17,-199.86) 6(-0.17,-249.86) 7(-0.17,-299.86) 8(-0.17,-349.86) 9(219.83,-349.86) 10(219.83,-299.86) 11(219.83,-249.86) 12(219.83,-199.86) 13(219.83,-149.86) 14(219.83,-99.86) 15(219.83,-49.86) 16(219.83,0.14)
  silkscreen extent 64,-375 155,25
SOT-23 [mil]
  rect 36x36 smd: 1(0.48,0.14) 2(75.48,0.14)
  rect 36x50 smd: 3(38.48,80.14)
  silkscreen extent -20,-5 95,85
SOT-223-3L [mm] "LM1117"
  rect 1.5x0.7 smd: 1(0,2.3) 2(0,0) 3(0,-2.3)
  rect 1.6x3 smd: 4(5.8,0)
  silkscreen extent 1.02,-3.3 4.7,3.3
SSOP4 [mil]
  rect 80x30 smd: 1(-129.69,25.43)
  oval 80x30 smd: 2(-129.69,-24.57) 3(130.31,-24.57) 4(130.31,25.43)
  silkscreen extent -210,-55 180,55
TO-252AA [mil]
  oct 45x95 smd: 1(0,0.38)
  rect 225x265 smd: 2(89,251.38)
  rect 45x95 smd: 3(179,0.38)
  silkscreen extent -41,100 219,405
TO-263 [mm]
  rect 10.16x10.16 smd: 0(-0.61,4.064)
  rect 1.1x3.048 smd: 1(-4.076,-5.7) 2(-2.376,-5.7) 3(-0.676,-5.7) 4(1.024,-5.7) 5(2.726,-5.708)
  silkscreen extent -5.89,-1.19 4.67,9.35
W143-4 [mm]
  round 1.6 hole 0.9: 1(0.005,-7.506) 2(0.005,-5.006) 3(0.005,-2.506) 4(0.005,-0.006)
  silkscreen extent -3.79,-10.39 2.71,2.81

## Part data
C1 C2 C3 C4 C5 C7 C8 C9 C10 C11 C12 C13 C14 C15 C20 C21 C22 C23 C24 C25 C26 C27 C28 C29 C30 C31 C32 C33 C34 C35 C36 C37 C38 C39 C40 C41 C42 C43 C44 C45 C46 C47 C48 C49 C50 C51 C52 C53 C54 C55 C56 C57 C58 C59 C60 C61 C62 C63 C64 C65 C66 C67 C68 C69: library part CAP, "Capacitor"
C16 C18 C19: library part "Cap Pol1", "Polarized Capacitor (Radial)"
C17: library part "CAPACITOR POL", "Capacitor"
D2 D3 D4 D5 D6 D7 D8 D9 D10 D14 D16 D17 D18 D19 D20 D21 D50 D51: library part LED0, "Typical INFRARED GaAs LED"
D11 D13: library part ZENER2, "Zener Diode"
D12: library part "D Schottky", "Schottky Diode"
D22 D23 D24 D25 D26 D27 D28 D29 D30 D31 D32 D33: library part LED
D34 D35 D36 D37 D38: library part DIODE, "Diode"
D39 D40 D41 D42 D43 D44 D45 D46 D47 D48 D49: library part 1N4148
DS1: library part "Dpy Amber-CA", "7.62 mm Black Surface Orange 7-Segment Display: CA, RH DP"
F1: library part FUSE2, "Fuse"
J1: library part "Header 8X2", "Header, 8-Pin, Dual row"
J2 J3 J18: library part CON4, "Connector"
J4 J5 J6 J8: library part "Header 9X2", "Header, 9-Pin, Dual row"
J7: library part JTAG
J9 J11: library part CON3, "Connector"
J10: library part "Header 5", "Header, 5-Pin"
J12 J13: library part "Header 4", "Header, 4-Pin"
J14 J15 J16 J17 J19: library part CON2
J20: library part "Header 6X2", "Header, 6-Pin, Dual row"
K1 K2 K3: library part Switch, "Switch"
P1 P4 P5 P6 P7 P8: library part OpticalCoupler, "OpticalCoupler"
P2: library part "Header 7", "Header, 7-Pin"
Q1: library part NPN, "NPN Bipolar Transistor"
Q2: library part PNP, "PNP Bipolar Transistor"
Q3 Q4 Q5: library part "MOSFET N"
Q6 Q11: library part MOSFET-N, "N-Channel MOSFET"
R1 R2 R3 R4 R5 R6 R7 R8 R9 R17 R18 R19 R20 R21 R22: library part Res2
R12 R15 R16 R23 R65 R66 R67 R68 R69 R70 R71 R72 R73 R74 R75 R76 R83 R84 R87 R88 R89 R90 R91 R94 R99 R100 R101 R104 R105 R106 R107 R108 R111 R113 R115 R116 R117 R118: library part RES2
R13 R14 R24 R25 R26 R27 R28 R29 R30 R31 R32 R33 R34 R35 R36 R37 R38 R39 R40 R41 R42 R43 R44 R45 R46 R47 R48 R49 R50 R51 R52 R53 R54 R55 R56 R57 R58 R59 R60 R61 R62 R64 R77 R78 R79 R80 R81 R82 R85 R86 R92 R93 R95 R96 R97 R98 R102 R103 R109 R110 R112 R114: library part Res2, "Resistor"
U1: library part CRYSTAL
U2: library part LM2576, "TO-263"
U5: library part STM32F103VET6
U8: library part sop8(IRF7404)
U9: library part ULN2003, "Darlinton BJT Array"
U10 U11 U12 U13: library part SPI3232E
U14 U15: library part 74HC04, "Hex Inverters"
U17: "Low-Power Dual Voltage Comparator"

## Free pads (board coordinates)
  round 196.85 hole 133.86: 0(118.11,118.11) 1(4606.3,118.11) 2(4606.3,4606.3) 3(118.11,4606.3)
  round 51.18 hole 35.43: 0(3335,3590) 1(2720,1620) 2(2675,1510) 3(515,3010) 4(2815,1620)

## Via types
v1: diameter 30, hole 18, Top Layer to Bottom Layer, 301 vias
v2: diameter 35, hole 18, Top Layer to Bottom Layer, 22 vias
v3: diameter 50, hole 28, Top Layer to Bottom Layer, 4 vias
v4: diameter 28, hole 18, Top Layer to Bottom Layer, 1 vias

## Nets (pads, with @x,y where several pads share a name; then routed paths per layer and width w, separated by ;. In a path a pad name is that pad's centre, name@x,y a point inside that pad or via, vN(x,y) a via of type N, cw(c..) or ccw(c..) an arc to the next point about the centre after c; other vN are vias at no path point)
5V_LED: R25.1 R27.1 R29.1 R31.1 R33.1 R35.1 R37.1 R39.1 R41.1 R43.1 R45.1 R47.1 U8.5 U8.6 U8.7 U8.8 | length 6824.9
  Top Layer w40: v3@376.46,601.46 cw(c331.72,556.72) 395,556.72 ; v3(380,605) 395,590 R43.1@395,480 ; R45.1@710,480 715,485 v2(715,585) ; R47.1@1025,480 v2(1025,570) ; R25.1@1415,480 v2(1415,585) ; v2(1730,565) 1730,485 R27.1@1735,480 ; v2(2040,580) 2050,570 R29.1@2050,480 ; v2@2041.77,581.77 cw(c2021.89,561.89) 2050,561.89 ; v2(2470,575) 2480,565 R31.1@2480,485 ; v2@2471.77,576.77 cw(c2451.89,556.89) 2480,556.89 ; v2(2795,570) 2800,565 R33.1@2800,485 ; v2(3070,580) 3115,535 R35.1@3115,485 ; v2@3074.64,575.36 cw(c2989.29,490) R35.1@3110,490 ; v2(3465,585) 3480,570 R37.1@3480,485 ; v2@3466.21,587.19 cw(c3453.25,563.79) 3480,563.79 ; v2@3466.77,586.77 cw(c3434.82,554.82) 3480,554.82 ; v2(3785,575) 3795,565 R39.1@3795,485 ; v2@3786.77,576.77 cw(c3766.89,556.89) 3795,556.89 ; R41.1@4100,495 v2(4100,570) ; 4100,526.21 ccw(c4146.21,526.21) R41.1@4113.54,493.54
  Top Layer w60: U8.5@2225,1140 U8.6@2225,1190 U8.7@2225,1240 U8.8@2225,1290
  Bottom Layer w40: v3(380,605) 405,630 750,630 ; v3@383.54,601.46 cw(c452.43,532.57) 452.43,630 ; v2(715,585) 715,595 750,630 ; v2@1022.5,570 cw(c1052.68,570) 1031.34,591.34 ; v2(1025,570) 1025,585 1070,630 ; v2(1415,585) 1415,595 1450,630 ; v2(1730,565) 1730,575 1725,580 1725,630 ; v2@2038.34,578.13 cw(c2084.3,630) 2015,630 ; v2@2039.74,577.51 cw(c2042.64,605) 2015,605 ; v2(2040,580) 2015,605 ; v2(2470,575) 2430,615 2430,630 ; v2(2795,570) 2790,575 2790,585 2765,610 2765,630 ; v2(3070,580) 3070,590 3030,630 ; v2(3465,585) 3420,630 ; v2(3785,575) 3730,630 ; 4090.13,599.87 cw(c4060.25,570) v2@4102.5,570 ; v2(4100,570) 4095,575 4095,595 ; v2@4102.44,569.46 ccw(c4075.45,575.45) 4095,595 ; 750,630 1070,630 ; 1070,630 1450,630 ; 1450,630 1725,630 ; 1725,630 2015,630 ; 2015,605 2015,630 ; 2015,630 2225,630 2430,630 ; 2430,630 2765,630 ; 2765,630 3030,630 ; 3030,630 3420,630 ; 3420,630 3730,630 ; 3730,630 4060,630 4095,595
  Bottom Layer w60: 2225,630 v3(2225,1095)
+5V: C16.1 C19.1 C62.1 C63.1 C65.1 J4.4 J4.10 J4.16 J5.4 J5.10 J5.16 J6.4 J6.10 J6.16 J8.4 J8.10 J8.16 J12.4 J13.4 L1.2 P2.6 pad.2@2675,1510 R12.1 R14.1 R26.1 R28.1 R30.1 R32.1 R34.1 R36.1 R38.1 R40.1 R42.1 R44.1 R46.1 R48.1 R104.1 R105.1 R113.1 U2.4 U6.3 U8.1 U8.2 U8.3 U14.14 U15.14 U16.12 U17.8 | length 8441.3
  Top Layer w30: R44.1@500,480 v3(500,565) ; R46.1@815,480 v1(815,575) ; R48.1@1130,480 v1(1130,560) ; R26.1@1520,480 v1(1520,560) ; U15.14@1550,1015 1625,1090 C63.1@1695,1090 1695,1165 1720,1190 ; U15.14@1575,1015 cw(c1635.36,1015) v1@1592.68,1057.68 ; 1714.39,1184.39 cw(c1740,1158.79) v1(1740,1195) ccw(c1734.17,1175.83) 1720,1190 ; R28.1@1840,480 1840,555 v1(1845,560) ; R12.1@2130,1045 2130,1170 2110,1190 U8.3@2005,1190 v1(1870,1190) v1(1800,1190) 1720,1190 ; R30.1@2155,480 v1(2155,565) ; R32.1@2590,485 v1(2590,565) ; R34.1@2905,485 v1(2905,565) ; U14.14@2975,1040 2975,1120 3000,1145 C62.1@3070,1145 ; v1(2980,1125) cw(c3028.28,1076.72) 3028.28,1145 ; v1(3215,565) 3220,560 R36.1@3220,485 ; R38.1@3585,485 v1(3585,570) ; R40.1@3900,485 v1@3900,565 ; R42.1@4215,485 4215,575 v1(4220,580) ; U17.8@4260,3400 4335,3400 4375,3440 4375,3610 4390,3625 U16.12@4457.87,3625 4525,3625 4580,3570 4580,3490 ; C65.1@4515,3375 4515,3425 4580,3490 ; v1@4552.32,3462.32 ccw(c4509.64,3505) v1(4570,3505) ; v1(4555,3465) cw(c4555,3404.64) 4597.68,3447.32 ; 4580,3480.86 ccw(c4545.86,3480.86) v1(4570,3505) ; 4580,3529.14 cw(c4545.86,3529.14) v1(4570,3505) ; 4615.26,3429.74 ccw(c4640.43,3454.9) R105.1@4650.87,3420.88 ; R105.1@4642.07,3449.56 cw(c4623.87,3508.86) 4580,3465 ; v1(4645,3295) R105.1@4645,3435 4610,3435 4580,3465 ; v1(4570,3505) cw(c4558.75,3486.97) 4580,3486.97 ccw(c4558.75,3486.97) v1(4570,3505) ; 4580,3465 4580,3490
  Top Layer w40: v1(3770,3445) R104.1@3770,3595 ; v1(3800,3115) R113.1@3800,3200
  Top Layer w50: L1.2@1478.78,4050 L1.2@1478.78,4102.6
  Top Layer w60: U2.4@1119.41,3980.32 1445.32,3980.32 1478.78,4013.78 L1.2@1478.78,4050 ; L1.2@1478.78,4102.6 1509.17,4132.99 C16.1@1892.99,4132.99 ; C16.1@1919.37,4132.99 cw(c1983.05,4132.99) 1938.02,4178.02 ; U8.3@2005,1190 U8.2@2005,1240 U8.1@2005,1290 ; C19.1@2127.62,4463.84 ccw(c2210.65,4546.87) U6.3@2210.65,4429.45 ; R14.1@2360,4230 2360,4385 2315.55,4429.45 U6.3@2225,4429.45 2140.55,4429.45 C19.1@2110,4460 2110,4350 C16.1@1892.99,4132.99 ; v1(2740,4050) 1992.99,4050 C16.1@1910,4132.99 C16.1@1892.99,4132.99
  Bottom Layer w50: J12.4@419.75,2109.8 429.75,2099.8 J13.4@429.75,1699.8 429.75,1604.75 285,1460 285,535 470,535 v3(500,565)
  other v1: 330,535 3900,575 1600,1065 2550,4050 2585,4050 2620,4050 2655,4050
+24V: C4.1 C8.1 C17.1 D11.2 D13.2 J1.2 J1.4 J1.6 J1.8 J1.10 J1.12 J1.14 J1.16 pad.3@515,3010 R16.1 R49.2 R50.2 R51.2 R52.2 R53.2 R54.2 R55.2 R115.2 U2.1 | length 5356.5
  Top Layer w20: R49.2@685,680 v1(765,680) ; R50.2@685,805 v1(770,805) ; R51.2@685,930 v1(775,930) ; R52.2@685,1055 v1(775,1055) ; R53.2@685,1180 v1(775,1180) ; R54.2@685,1305 v1(770,1305) ; R55.2@685,1430 715,1430 v1(760,1475) ; R55.2@690,1425 ccw(c690,1473.28) 724.14,1439.14 ; R55.2@690,1445 ccw(c690,1541.57) v1@758.28,1473.28 ; R49.2@700.61,669.39 cw(c726.21,643.79) 726.21,680 cw(c726.21,716.21) R49.2@700.61,690.61 ; R50.2@700.61,794.39 cw(c726.21,768.79) 726.21,805 cw(c726.21,841.21) R50.2@700.61,815.61 ; R51.2@700.61,919.39 cw(c726.21,893.79) 726.21,930 cw(c726.21,966.21) R51.2@700.61,940.61 ; R52.2@700.61,1044.39 cw(c726.21,1018.79) 726.21,1055 cw(c726.21,1091.21) R52.2@700.61,1065.61 ; R53.2@700.61,1169.39 cw(c726.21,1143.79) 726.21,1180 cw(c726.21,1216.21) R53.2@700.61,1190.61 ; R54.2@700.61,1294.39 cw(c726.21,1268.79) 726.21,1305 cw(c726.21,1341.21) R54.2@700.61,1315.61 ; v1(2045,4205) 2055,4215 R16.1@2115.93,4215 ; v1@2048.54,4201.46 cw(c2081.21,4168.79) 2081.21,4215 ; 2071.89,4215 ccw(c2071.89,4282.18) R16.1@2119.39,4234.68
  Top Layer w50: C8.1@90,510 90,670 126.26,706.26 J1.2@126.26,725 J1.4@126.26,803.74 J1.6@126.26,882.48 J1.8@126.26,961.22 J1.10@126.26,1039.96 J1.12@126.26,1118.7 J1.14@126.26,1197.44 J1.16@126.26,1276.18
  Top Layer w80: v3(1175,4145) v1@1215.48,4185.48 ; v3@1181.49,4131.47 ccw(c1155.59,4185.48) v1@1215.48,4185.48 ; v3@1185.61,4134.39 ccw(c1113.49,4206.51) 1215.48,4206.51 ; C17.1@1514.91,4475.97 1410.73,4580.14 D11.2@1215.48,4580.14 D13.2@1215.48,4315.14 v1@1215.48,4185.48
  Bottom Layer w80: v1(1075,3710) v1(1155,3710) 1155,4125 v3(1175,4145) ; C17.1@1515,4475.97 1515,4420 1570,4365 1811.11,4365 1823.11,4377 1886.89,4377 1898.89,4365 1930,4365 2060,4235 2860,4235 2980,4115 R115.2@3200,4115
  other v1: 1115,3710 1220,4175 1210,4420 1215,4475
+24VA: C10.1 C13.1 C15.1 C67.1 D39.K D40.K D41.K D42.K D43.K J14.1 J15.1 J16.1 J17.1 J19.1 pad.0@3335,3590 Q7.2 Q8.2 Q9.2 Q10.2 R85.1 R86.1 R102.1 R103.1 R114.1 R115.1 U16.6 | length 9813.8
  Top Layer w20: R114.1@4220,1835 4548.43,1835 J19.1@4560,1823.43 ccw(c4532.06,1795.48) 4532.06,1835 ; R114.1@4230.61,1824.39 cw(c4256.21,1798.79) 4256.21,1835 cw(c4256.21,1871.21) R114.1@4230.61,1845.61 ; 4483.77,1835 cw(c4483.77,1747.2) J19.1@4545.86,1809.28
  Top Layer w40: v2(3750,3910) 3750,3905 3760,3895 C67.1@3760,3795 3850,3795 3870,3775 U16.6@3942.13,3775 ; 3760,3891.89 ccw(c3731.89,3891.89) 3751.77,3911.77 cw(c3732.09,3891.97) 3760,3891.97 ; v2(3850,4195) 3850,4234.38 Q10.2@3880.14,4264.52 ; v2@3850,4196.58 cw(c3948.08,4196.58) Q10.2@3878.73,4265.93 ; 3850,4221.89 cw(c3898.35,4221.89) Q10.2@3879.36,4266.36 ; v2(4005,4185) 4035.14,4215.14 Q7.2@4035.14,4264.52 ; v2(4165,4185) 4165,4238 Q8.2@4195,4268 ; v2@4165,4200.4 cw(c4262.6,4200.4) Q8.2@4193.59,4269.41 ; 4165,4225.58 cw(c4213.14,4225.58) Q8.2@4194.21,4269.84 ; R103.1@4225,2155 4543.43,2155 J17.1@4560,2138.43 ; R102.1@4230,2480 4538.43,2480 J16.1@4560,2458.43 ; Q9.2@4355.14,4269.52 4355.14,4204.86 v2(4389.27,4170.73) ; 4483.77,2480 cw(c4483.77,2382.2) J16.1@4552.93,2451.35 ; 4495.84,2155 cw(c4495.84,2074.27) J17.1@4552.93,2131.35
  Bottom Layer w40: 3335,3895 3352,3912 3748,3912 v2(3750,3910) ; R86.1@4165,2655 4165,2615 4269.52,2510.48 D41.K@4390.14,2510.48 4507.95,2510.48 J16.1@4560,2458.43 ; R86.1@4170,2650 ccw(c4266.57,2650) 4198.28,2581.72 ; C13.1@4245,1835 4280.48,1870.48 D43.K@4390.14,1870.48 4512.95,1870.48 J19.1@4560,1823.43 ; C13.1@4248.54,1836.46 cw(c4330.66,1754.34) 4330.66,1870.48 ; D42.K@4390.14,2185.48 4512.95,2185.48 J17.1@4560,2138.43 ; D40.K@4390.14,2815.48 4517.95,2815.48 J15.1@4560,2773.43
  Bottom Layer w60: R115.1@3335,4115 3570,4115 3640,4185 v2(4005,4185) v2(4165,4185) 4375,4185 v2(4389.27,4170.73) ; 4138,3053 4215.48,3130.48 ; 4179.64,3094.64 cw(c4265,3009.29) R85.1@4265,3130 ; R85.1@4268.04,3133.97 ccw(c4243.75,3102.21) 4215.48,3130.48 ; 4470.54,3130.48 cw(c4470.54,3003.97) J14.1@4560,3093.43 ; J19.1@4560,1823.43 4628.43,1823.43 4665,1860 4665,2215 ; 4599.99,2474.99 cw(c4560,2514.98) J16.1@4560,2458.43 4583.43,2458.43 4665,2540 ; 4608.52,2158.52 cw(c4560,2207.05) J17.1@4560,2138.43 4588.43,2138.43 4665,2215 ; 4617.06,2797.06 cw(c4560,2854.12) J15.1@4560,2773.43 4593.43,2773.43 4665,2845 ; 4215.48,3130.48 D39.K@4395.14,3130.48 4522.95,3130.48 J14.1@4560,3093.43 ; J14.1@4560,3093.43 4646.57,3093.43 4665,3075 4665,2845 ; 4665,2215 4665,2540 ; 4665,2540 4665,2845
  Bottom Layer w80: R115.1@3335,4115 3335,3895 3335,3090 3372,3053 4138,3053
+24VIN: F1.1 J2.1 J2.3 J3.1 J3.2 | length 1589
  Bottom Layer w80: J3.2@123.78,3813.12 cw(c236.97,3699.93) 236.97,3860 ; J3.1@123.78,3899.51 ccw(c219.18,3994.91) 219.18,3860 ; J3.2@129.8,3807.1 J3.1@129.8,3905.53 ; J2.3@134.29,4299.57 J2.1@299.65,4299.57 495.43,4299.57 610,4185 610,3970 500,3860 134.8,3860
A: R91.1 U5.8 | length 3096.4
  Top Layer w10: U5.8@2528.43,2862.24 2528.43,3033.43 2567,3072 3240,3072 3262,3094 3262,3395.08 3317.92,3451 3591,3451 3605,3465 3605,3895 3670,3960 3670,4170 3690,4190 3790,4190 3800,4200 3800,4615 3780,4635 R91.1@3680,4635 ; R91.1@3699.14,4620.86 cw(c3733.28,4586.72) 3733.28,4635 cw(c3733.28,4683.28) R91.1@3699.14,4649.14
AGND: C10.2 C13.2 C15.2 C64.2 C65.2 C67.2 C69.2 Q3.2 Q4.2 Q5.2 Q6.3 Q7.1 Q8.1 Q9.1 Q10.1 Q11.3 R79.2 R80.2 R95.2 R96.2 R106.1 R107.2 R108.2 R110.2 U16.1 U16.10 U16.11 U16.20 | length 3167.3
  Top Layer w20: R110.2@3490,1700 R110.2@3500.55,1689.45 ; C64.2@4634.39,3740.61 ccw(c4608.79,3766.21) 4645,3766.21 ccw(c4681.21,3766.21) C64.2@4655.61,3740.61 ; C64.2@4645,3725 v1(4645,3855)
  Top Layer w30: v1(3855,3575) U16.10@3942.13,3575
  Top Layer w40: R110.2@3500.55,1689.45 3648.94,1689.45 3648.94,1641.06 3650,1640 v1(3650,1635) ; v1(3500.55,1975) 3500.55,2029.45 Q6.3@3648.94,2029.45 ; R110.2@3508.54,1703.54 ccw(c3542.54,1737.54) 3542.54,1689.45 ; R96.2@3508.54,2043.54 ccw(c3542.54,2077.54) 3542.54,2029.45 ; C67.2@3670,3795 v1(3670,3870) ; R107.2@3725,4115 cw(c3725,4042.57) v1@3776.21,4093.79 ; R107.2@3725,4125 3745,4125 v1(3785,4085) ; R95.2@3815,2325 3845,2295 v1(3905,2295) ; R80.2@3815,2525 v1(3890,2525) ; R79.2@3815,2725 3870,2725 v1(3895,2700) ; R95.2@3823.54,2328.54 ccw(c3904.5,2409.5) v1@3904.5,2295 ; v1@3880,4390 3880.14,4389.86 Q10.1@3880.14,4339.52 ; v1(3940,4105) 3942.13,4102.87 U16.1@3942.13,4025 ; v1(4010,2310) 4010.48,2310.48 Q5.2@4010.48,2360.14 ; v1(4010,2520) 4010.48,2520.48 Q4.2@4010.48,2560.14 ; v1(4035,2700) 4035.48,2700.48 Q3.2@4035.48,2740.14 ; v1(4035,4400) 4035.14,4399.86 Q7.1@4035.14,4339.52 ; R106.1@4180,1565 4355,1565 C69.2@4385,1535 ; v1(4194.86,4388.48) 4195,4388.34 Q8.1@4195,4343 ; 4312.57,1565 cw(c4312.57,1467.57) C69.2@4381.46,1536.46 ; v1(4355,4405) 4355.14,4404.86 Q9.1@4355.14,4344.52 ; v1(4425,3300) C65.2@4425,3375 4425,3425 4457.87,3457.87 U16.11@4457.87,3575 ; U16.20@4457.87,4025 v1(4555,4025) ; v1(4520,4355) 4600,4355 R108.2@4610,4345 ; 4561.72,4355 cw(c4561.72,4296.72) R108.2@4602.93,4337.93
  Bottom Layer w40: C10.2@3490,4020 3585,4020 3650,4085 v1(3785,4085) ; C15.2@3915,2950 3930,2935 v1(4005,2935) ; C15.2@3918.54,2948.54 ccw(c3951.21,2981.21) 3951.21,2935 ; C13.2@4245,1745 4245,1660 v1(4275,1630)
  other v1: 4275,1570 3880,4395
B: R90.1 U5.9 | length 2971.3
  Top Layer w10: U5.9@2508.74,2862.24 2508.74,3053.74 2544,3089 3232.96,3089 3245,3101.04 3245,3402.12 3310.88,3468 3583.96,3468 3588,3472.04 3588,3902.04 3653,3967.04 3653,4177.04 3682.96,4207 3770.04,4207 3780,4216.96 3780,4507 3757,4530 R90.1@3680,4530 ; R90.1@3699.14,4515.86 cw(c3733.28,4481.72) 3733.28,4530 cw(c3733.28,4578.28) R90.1@3699.14,4544.14
BOOT0: R62.1 R64.1 U5.94 | length 2628.3
  Top Layer w10: R62.1@1980,3405 R64.1@2085,3405 2085,3340 v1(2090,3335) ; R62.1@1994.14,3390.86 cw(c2028.28,3356.72) 2028.28,3405 cw(c2028.28,3453.28) R62.1@1994.14,3419.14 ; R64.1@2070.86,3385.86 cw(c2036.72,3351.72) 2085,3351.72 cw(c2133.28,3351.72) R64.1@2099.14,3385.86 ; R64.1@2070.86,3390.86 ccw(c2036.72,3356.72) 2036.72,3405 ccw(c2036.72,3453.28) R64.1@2070.86,3419.14 ; 2085,3371.21 ccw(c2126.21,3371.21) v1@2097.07,3342.07 ; v1@2572.07,3387.93 cw(c2589.14,3370.86) 2589.14,3395 cw(c2589.14,3419.14) v1@2572.07,3402.07 ; v1@2575,3395 v1(2975,3395) ; U5.94@2727.24,2683.11 2966.89,2683.11 v1(2975,2675) ccw(c2955.42,2655.42) 2955.42,2683.11 ; 2931.28,2683.11 cw(c2931.28,2631.28) v1@2967.93,2667.93 ; v1@2967.93,3387.93 ccw(c2950.86,3370.86) 2950.86,3395 ccw(c2950.86,3419.14) v1@2967.93,3402.07
  Bottom Layer w10: v1(2090,3335) 2095,3340 2100,3340 2145.79,3385.79 2555.79,3385.79 v1(2565,3395) cw(c2542.78,3417.22) 2542.78,3385.79 ; v1@2090,3345 ccw(c2090,3381.21) 2115.61,3355.61 ; v1@2100,3335 cw(c2112.07,3335) 2103.54,3343.54 ; 2518.63,3385.79 ccw(c2518.63,3441.37) v1@2557.93,3402.07 ; v1@2967.93,2682.07 ccw(c2950.86,2699.14) 2975,2699.14 ccw(c2999.14,2699.14) v1@2982.07,2682.07 ; v1@2967.93,3387.93 cw(c2950.86,3370.86) 2975,3370.86 cw(c2999.14,3370.86) v1@2982.07,3387.93 ; v1(2975,2675) v1(2975,3395)
BOOT1: R24.2 U5.37 | length 326.2
  Top Layer w10: R24.2@1895,2615 1975,2615 2005.31,2584.68 U5.37@2132.76,2584.68 ; R24.2@1914.14,2600.86 cw(c1948.28,2566.72) 1948.28,2615 cw(c1948.28,2663.28) R24.2@1914.14,2629.14
BT00: Q1.2 R59.2 R61.2 U13.9 | length 1628.1
  Top Layer w10: U13.9@1154.88,3220.19 cw(c1142.93,3208.24) 1159.83,3208.24 cw(c1176.73,3208.24) U13.9@1164.78,3220.19 ; U13.9@1159.83,3225.14 1159.83,3155.17 1170,3145 1740,3145 1770,3175 R59.2@1770,3405 1822.5,3405 ; R59.2@1755.86,3385.86 cw(c1721.72,3351.72) 1770,3351.72 cw(c1818.28,3351.72) R59.2@1784.14,3385.86 ; R59.2@1784.14,3390.86 cw(c1818.28,3356.72) 1818.28,3405 cw(c1818.28,3453.28) R59.2@1784.14,3419.14 ; R61.2@1860.86,3390.86 ccw(c1826.72,3356.72) 1826.72,3405 ccw(c1826.72,3453.28) R61.2@1860.86,3419.14 ; Q1.2@1866.67,3670.58 cw(c1848.14,3650.48) 1875.48,3650.48 ; R61.2@1875,3405 1822.5,3405 ; Q1.2@1875.48,3680.14 1875.48,3650.48 ; Q1.2@1884.29,3670.58 ccw(c1902.82,3650.48) 1875.48,3650.48 ; 1822.5,3405 1822.5,3597.5 1875.48,3650.48
C: R89.1 U5.15 | length 2881
  Top Layer w10: U5.15@2390.63,2862.24 2390.63,2970.63 2526,3106 3219,3106 3228,3115 3228,3409.17 3303.83,3485 3560,3485 3571,3496 3571,3909.08 3636,3974.08 3636,4184.08 3675.92,4224 3740,4224 3763,4247 3763,4417 3750,4430 R89.1@3680,4430 ; R89.1@3699.14,4415.86 cw(c3733.28,4381.72) 3733.28,4430 cw(c3733.28,4478.28) R89.1@3699.14,4444.14
CHECK1: R108.1 U16.19 U17.3 | length 1578.3
  Top Layer w30: U17.3@4040,3300 4120,3300 4155,3335 4155,3430 4175,3450 v1(4200,3450) ccw(c4200,3389.64) 4157.32,3432.32 ; U16.19@4457.87,3975 v1(4560,3975) ; R108.1@4599.39,4199.39 cw(c4573.79,4173.79) 4610,4173.79 cw(c4646.21,4173.79) R108.1@4620.61,4199.39 ; R108.1@4610,4210 4610,4155 v1(4635,4130)
  Bottom Layer w30: v1(4200,3450) 4445,3450 4560,3565 v1(4560,3975) 4635,4050 v1(4635,4130)
CHECK2: R107.1 U16.2 U17.5 | length 1367.2
  Top Layer w20: v1@4021.46,3771.46 cw(c4000.86,3750.86) 4030,3750.86 ; v1(4025,3775) 4030,3770 v1(4030,3460) ; v1(4180,3250) U17.5@4260,3250
  Top Layer w30: R107.1@3725,3990 3740,3975 v1(3800,3975) ; R107.1@3735.61,4000.61 ccw(c3797.43,4062.43) v1@3797.43,3975 ; v1(3880,3975) U16.2@3942.13,3975
  Bottom Layer w20: v1(3880,3975) 4005,3975 4025,3955 v1(4025,3775) ; v1(4030,3460) 4115,3460 4180,3395 v1(4180,3250)
  Bottom Layer w30: v1(3800,3975) v1(3880,3975)
CLK_IN: U1.3 U5.12 | length 649.3
  Top Layer w10: v1@2442.93,2952.93 cw(c2426.62,2936.62) 2449.68,2936.62 ; U5.12@2449.69,2862.24 2449.69,2959.68 v1(2450,2960) ; 2449.69,2935.1 cw(c2474.9,2935.1) v1@2457.07,2952.93
  Top Layer w40: U1.3@2005.48,3050.07 2010.55,3045 v1(2105,3045) ; U1.3@2031.9,3056.81 ccw(c2060.41,3085.32) 2060.41,3045
  Bottom Layer w40: v1(2105,3045) 2365,3045 v1(2450,2960)
D: R88.1 U5.17 | length 2066.8
  Top Layer w10: U5.17@2351.26,2862.24 2351.26,2979.34 2511.92,3140 2885,3140 2900,3155 v1(2900,3265) ; v1@2892.93,3257.93 cw(c2875.86,3240.86) 2900,3240.86 cw(c2924.14,3240.86) v1@2907.07,3257.93 ; v1(2925,3935) 2950,3960 R88.1@2950,4235 ; v1@2925,3945 ccw(c2925,3969.14) 2942.07,3952.07 ccw(c2959.14,3935) v1@2935,3935 ; R88.1@2935.86,4220.86 cw(c2901.72,4186.72) 2950,4186.72 cw(c2998.28,4186.72) R88.1@2964.14,4220.86
  Bottom Layer w10: v1@2892.93,3272.07 ccw(c2875.86,3289.14) 2900,3289.14 ccw(c2924.14,3289.14) v1@2907.07,3272.07 ; v1(2900,3265) 2900,3910 v1(2925,3935) ; v1@2915,3935 cw(c2890.86,3935) 2907.93,3917.93 cw(c2925,3900.86) v1@2925,3925
DP: R9.1 U5.16 | length 2479.4
  Top Layer w10: U5.16@2370.94,2862.24 2370.94,2974.99 2518.96,3123 3203,3123 3211,3131 3211,3416.21 3296.79,3502 3531,3502 3554,3525 3554,3916.12 3585,3947.12 R9.1@3585,4225 ; R9.1@3570.86,4205.86 cw(c3536.72,4171.72) 3585,4171.72 cw(c3633.28,4171.72) R9.1@3599.14,4205.86
DTR: J10.4 R56.2 U13.13 | length 1909.8
  Top Layer w10: v1(400,3150) 1045,3150 1070,3175 v1(1070,3425) 1070.14,3425.14 U13.13@1159.83,3425.14 1319.86,3425.14 1330,3415 R56.2@1330,3310 ; v1@407.07,3142.93 cw(c424.14,3125.86) 424.14,3150 cw(c424.14,3174.14) v1@407.07,3157.07 ; v1@1062.93,3417.93 cw(c1045.86,3400.86) 1070,3400.86 cw(c1094.14,3400.86) 1077.07,3417.93 cw(c1094.48,3400.52) 1094.48,3425.14 ; v1@1077.07,3432.07 ccw(c1093.8,3448.8) 1093.8,3425.14 ; U13.13@1117.67,3420.19 ccw(c1105.72,3408.24) 1105.72,3425.14 ccw(c1105.72,3442.04) U13.13@1117.67,3430.09 ; U13.13@1201.99,3420.19 cw(c1213.94,3408.24) 1213.94,3425.14 cw(c1213.94,3442.04) U13.13@1201.99,3430.09 ; R56.2@1315.86,3329.14 ccw(c1281.72,3363.28) 1330,3363.28 ccw(c1378.28,3363.28) R56.2@1344.14,3329.14
  Bottom Layer w10: J10.4@370.75,3262.32 cw(c328.07,3219.64) 388.43,3219.64 cw(c448.78,3219.64) J10.4@406.1,3262.32 ; J10.4@377.82,3269.39 cw(c352.21,3243.79) 388.43,3243.79 cw(c424.64,3243.79) J10.4@399.03,3269.39 ; 388.43,3177.94 ccw(c427.94,3177.94) v1(400,3150) 388.43,3161.57 J10.4@388.43,3280 ; 388.43,3202.09 ccw(c452.09,3202.09) v1@407.07,3157.07
DTR_M: R58.1 R60.2 U13.12 | length 912.3
  Top Layer w10: U13.12@1159.83,3375.14 1244.86,3375.14 1245,3375.28 v1(1245,3380) ; U13.12@1201.99,3370.19 cw(c1213.94,3358.24) 1213.94,3375.14 cw(c1213.94,3392.04) U13.12@1201.99,3380.09 ; 1209.13,3375.14 ccw(c1209.13,3415.87) v1@1237.93,3387.07 ; v1(1490,3380) 1515,3405 ; v1@1490,3390 ccw(c1490,3414.14) 1507.07,3397.07 ccw(c1524.14,3380) v1@1500,3380 ; R60.2@1545.15,3391.6 ccw(c1515,3364.38) 1515,3405 ; R60.2@1545.15,3418.4 cw(c1515,3445.62) 1515,3405 ; R60.2@1574.14,3390.86 cw(c1608.28,3356.72) 1608.28,3405 cw(c1608.28,3453.28) R60.2@1574.14,3419.14 ; R58.1@1650.86,3390.86 ccw(c1616.72,3356.72) 1616.72,3405 ccw(c1616.72,3453.28) R58.1@1650.86,3419.14 ; R58.1@1665,3405 R60.2@1560,3405 1515,3405
  Bottom Layer w10: v1(1245,3380) v1(1490,3380) ; v1@1252.07,3372.93 cw(c1269.14,3355.86) 1269.14,3380 cw(c1269.14,3404.14) v1@1252.07,3387.07 ; v1@1482.93,3372.93 ccw(c1465.86,3355.86) 1465.86,3380 ccw(c1465.86,3404.14) v1@1482.93,3387.07
E: R87.1 U5.18 | length 2278.8
  Top Layer w10: U5.18@2331.57,2862.24 2331.57,2983.7 2504.88,3157 2785,3157 ; v1@2790.77,3186.15 cw(c2766.12,3175.88) 2785,3157 ; v1@2794.72,3181.51 cw(c2788.8,3172) 2800,3172 ; 2795.56,3167.56 ccw(c2781.03,3182.1) v1(2800,3190) 2800,3172 ; v1@2800,3920 2875,3995 2875,4315 2895,4335 R87.1@2950,4335 ; v1@2805.28,3181.51 ccw(c2811.2,3172) 2800,3172 ; v1@2807.5,3937.5 ccw(c2807.5,3961.64) 2824.57,3944.57 ccw(c2841.64,3927.5) v1@2817.5,3927.5 ; R87.1@2930.86,4320.86 ccw(c2896.72,4286.72) 2896.72,4335 ccw(c2896.72,4383.28) R87.1@2930.86,4349.14 ; 2785,3157 2800,3172
  Bottom Layer w10: v1@2792.93,3197.07 ccw(c2751.72,3238.28) 2810,3238.28 ; 2800,3885.25 cw(c2849.75,3885.25) v1@2814.57,3920.43 ; 2800,3909.39 cw(c2825.61,3909.39) v1(2807.5,3927.5) ; 2810,3214.14 cw(c2775.86,3214.14) v1(2800,3190) 2810,3200 2810,3640 2800,3650 2800,3920 v1@2815,3935
F: R84.1 U5.24 | length 2365.4
  Top Layer w10: U5.24@2213.46,2862.24 2213.46,2913.67 2490.79,3191 2585,3191 ; v1@2590.05,3205.04 cw(c2572.63,3203.37) 2585,3191 ; v2@2591.2,3928.88 ccw(c2570.25,3950) 2600,3950 ; v1@2599.04,3196.05 ccw(c2597.37,3178.63) 2585,3191 ; v1(2600,3206) 2585,3191 ; v2(2600,3920) 2600,3950 ; v2@2608.8,3928.88 cw(c2629.75,3950) 2600,3950 ; R84.1@2929,4513 ccw(c2905,4495) 2905,4525 ; R84.1@2929,4537 cw(c2905,4555) 2905,4525 ; R84.1@2950,4525 2905,4525 ; 2600,3950 2625,3975 2790.96,3975 2840,4024.04 2840,4394.04 2880,4434.04 2880,4500 2905,4525
  Bottom Layer w10: v2@2591.16,3911.16 cw(c2569.82,3889.82) 2600,3889.82 cw(c2630.18,3889.82) v2@2608.84,3911.16 ; v1@2592.93,3213.07 ccw(c2575.86,3230.14) 2600,3230.14 ccw(c2624.14,3230.14) v1@2607.07,3213.07 ; v1(2600,3206) v2(2600,3920)
FLASH_CS: U5.29 U7.1 | length 976.9
  Top Layer w10: U7.1@1440,2835 1530,2835 v1(1535,2830) ; U7.1@1472.95,2830.05 cw(c1484.9,2818.1) 1484.9,2835 cw(c1484.9,2851.9) U7.1@1472.95,2839.95 ; 1498.79,2835 cw(c1498.79,2793.79) v1@1527.93,2822.93 ; v1@1862.2,2745.24 cw(c1864.72,2734.05) 1872.83,2742.17 ; v1@1867.07,2762.07 ccw(c1915.13,2810.13) 1915.13,2742.17 ; v1@1869.76,2752.8 ccw(c1880.95,2750.28) 1872.83,2742.17 ; 1890.99,2742.17 cw(c1890.99,2785.99) v1(1860,2755) 1872.83,2742.17 ; U5.29@2132.76,2742.17 1872.83,2742.17
  Bottom Layer w10: v1(1535,2830) 1785,2830 v1(1860,2755) ; v1@1542.07,2822.93 cw(c1559.14,2805.86) 1559.14,2830 cw(c1559.14,2854.14) v1@1542.07,2837.07 ; v1@1850,2755 ccw(c1825.86,2755) 1842.93,2772.07 ccw(c1860,2789.14) v1@1860,2765